# Altium PCB AtlysAFE.PcbDoc (part 1 of 2)
Units mm, origin at the board's own origin, x right, y up, seen from the top; angles counter-clockwise.
Board outline 100 x 101.6 mm, 6 copper layers (Top Layer, Internal Plane 1, Internal Plane 2, Internal Plane 3, Internal Plane 4, Bottom Layer), stack 1.611 mm thick; 311 components, 255 nets, 1157 pads, 209 vias.
Unrouted connection lines stored in the file: 701.
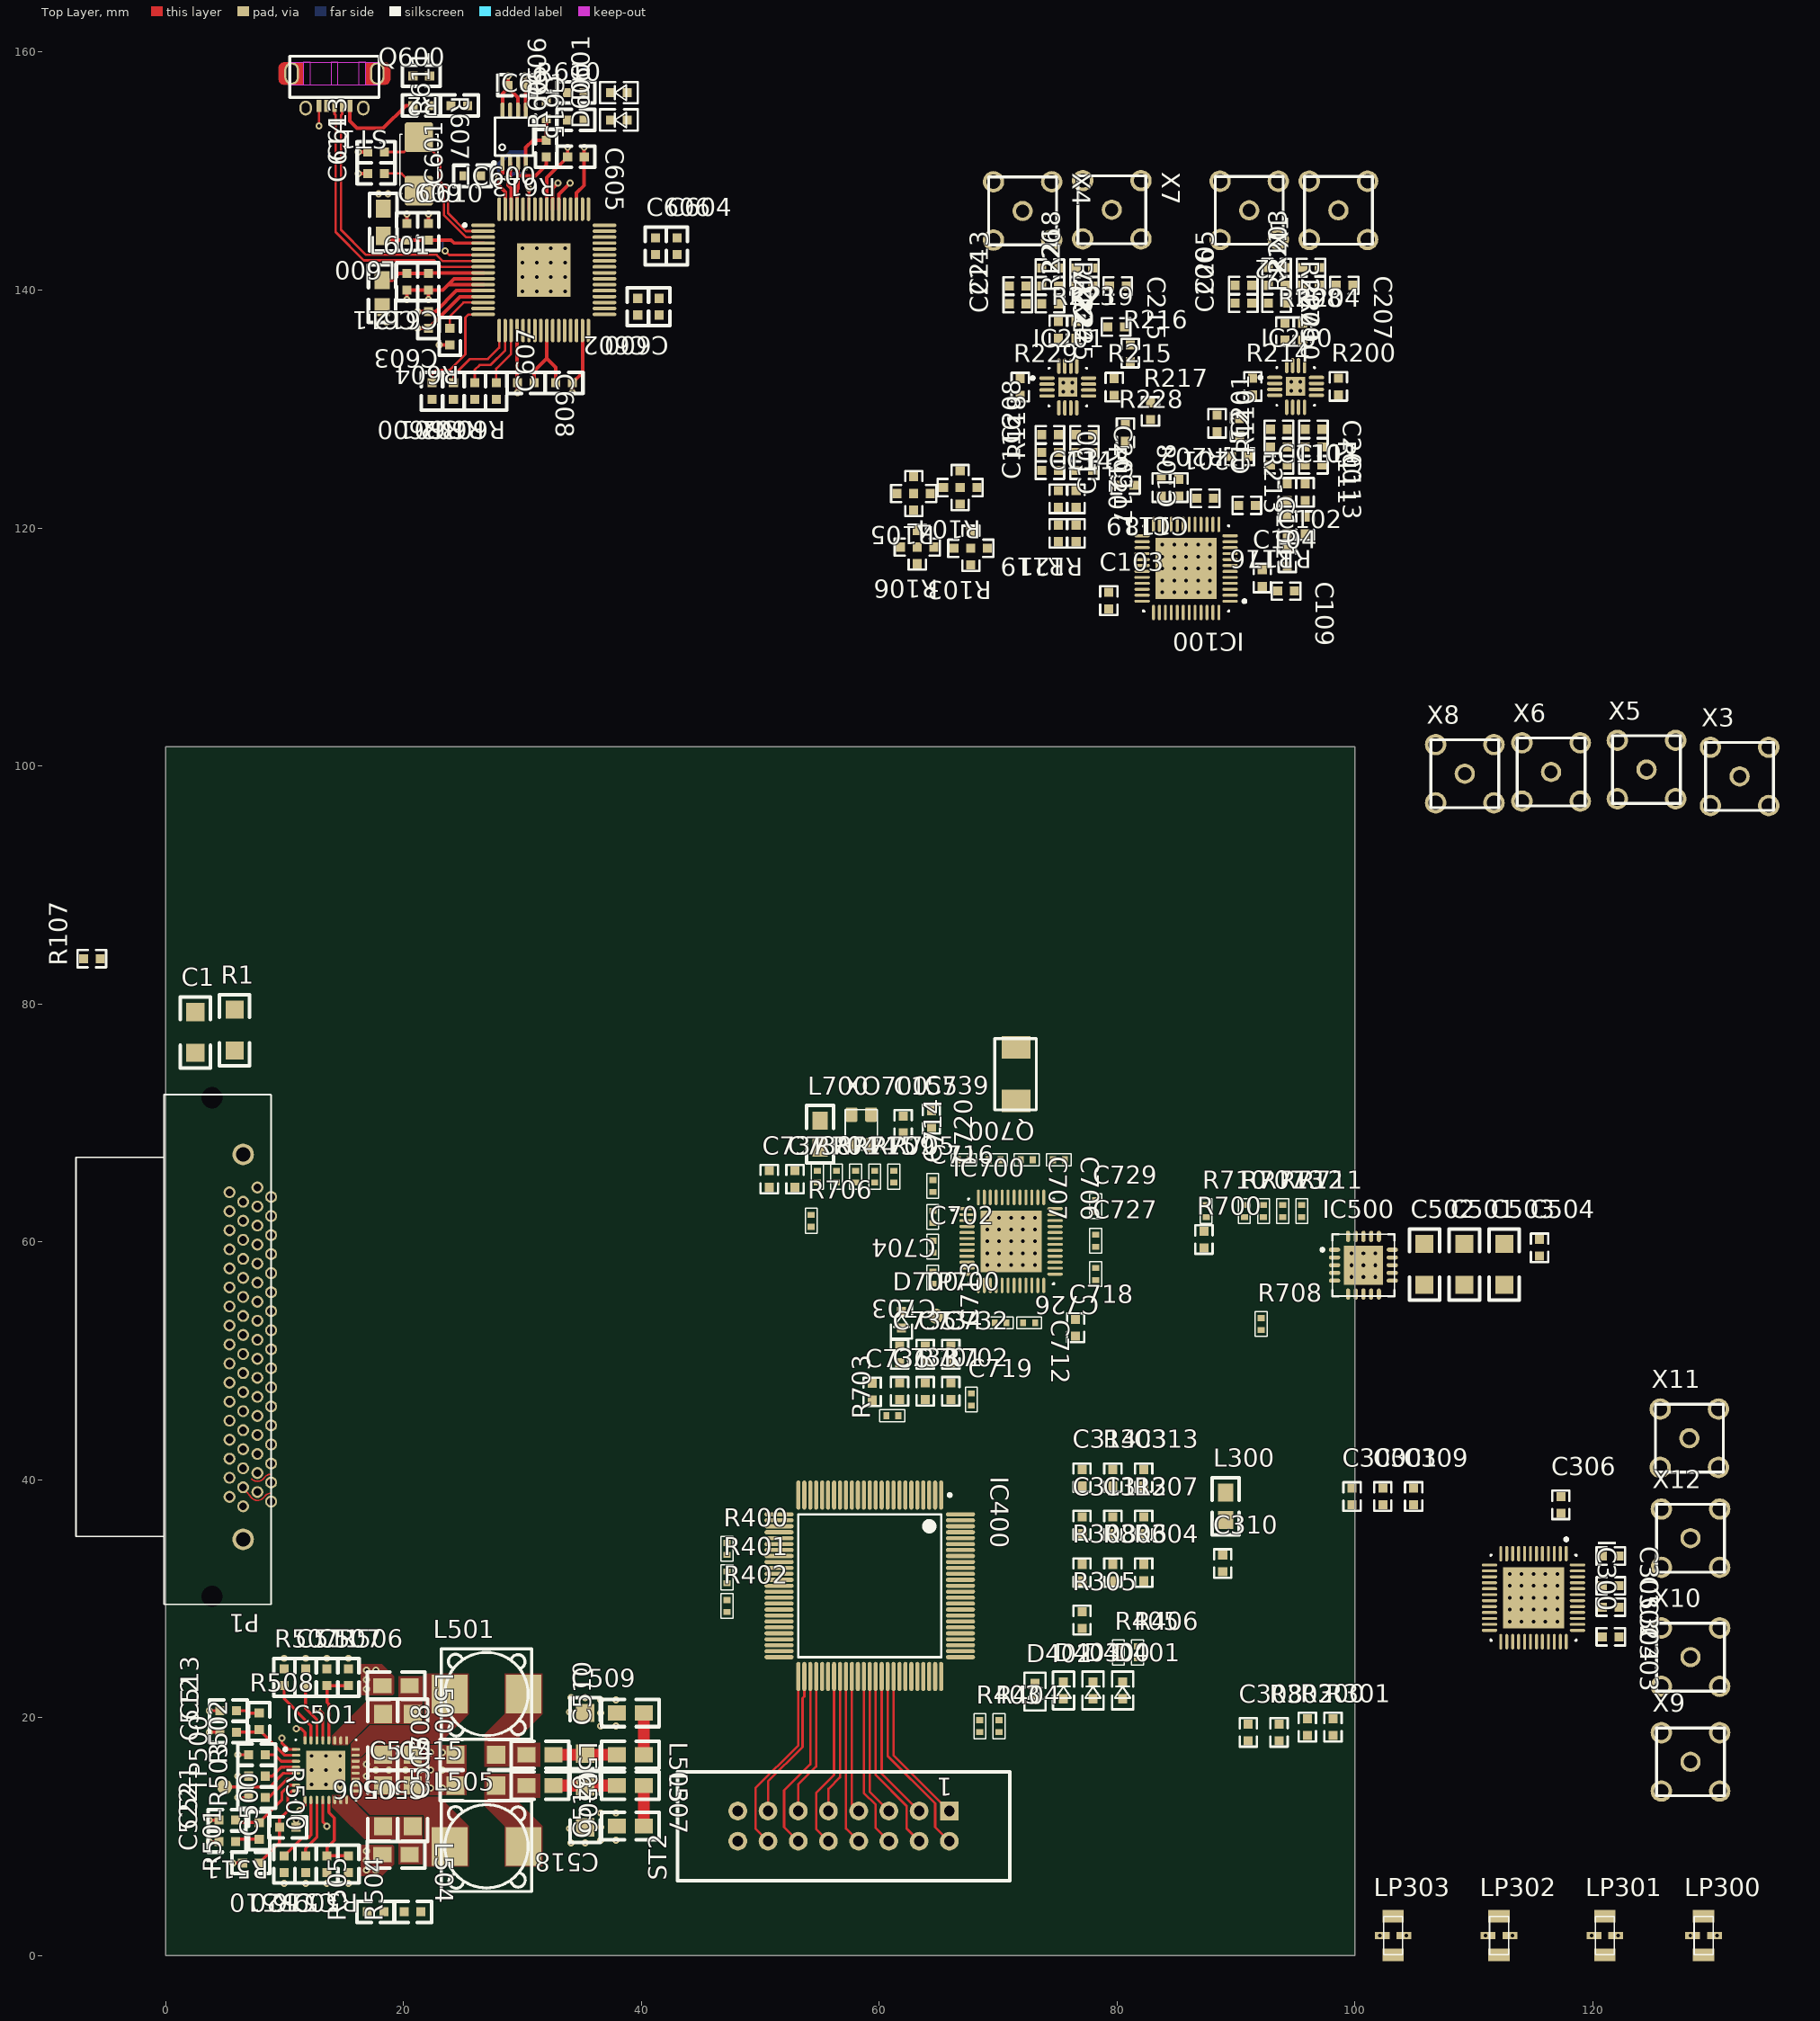
[diagram p0: Top Layer view]
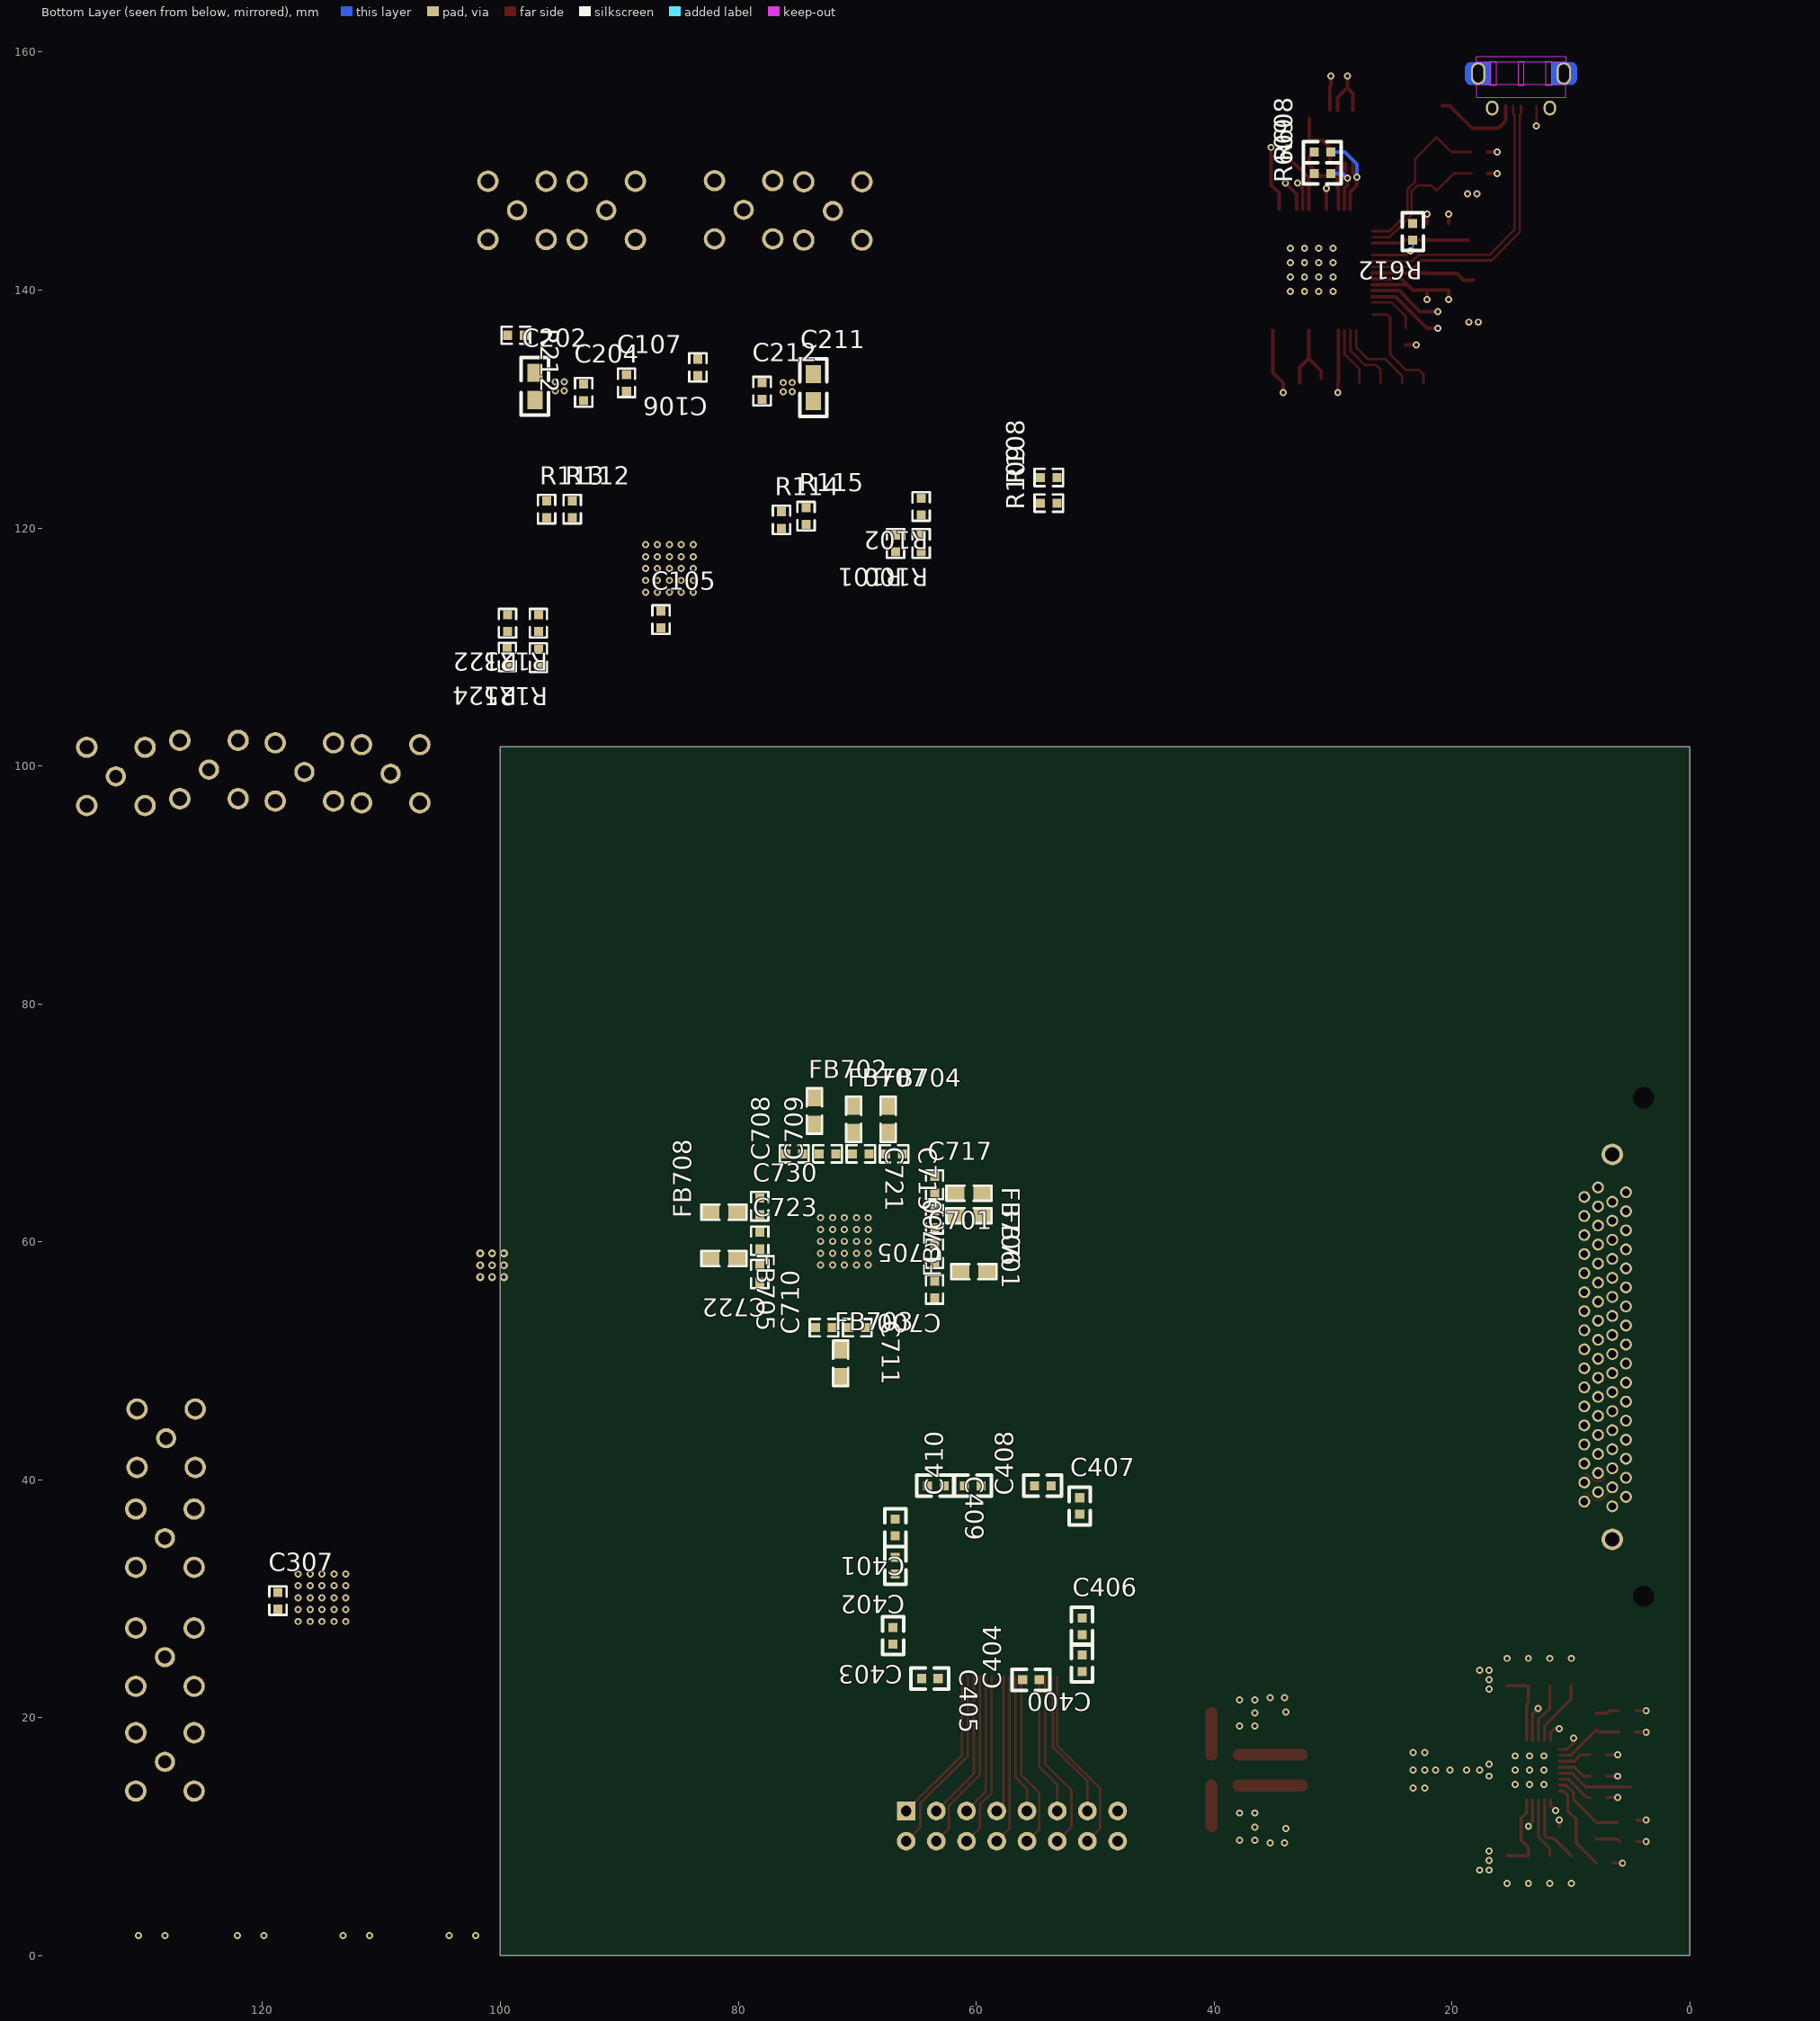
[diagram p1: Bottom Layer view, seen from below]
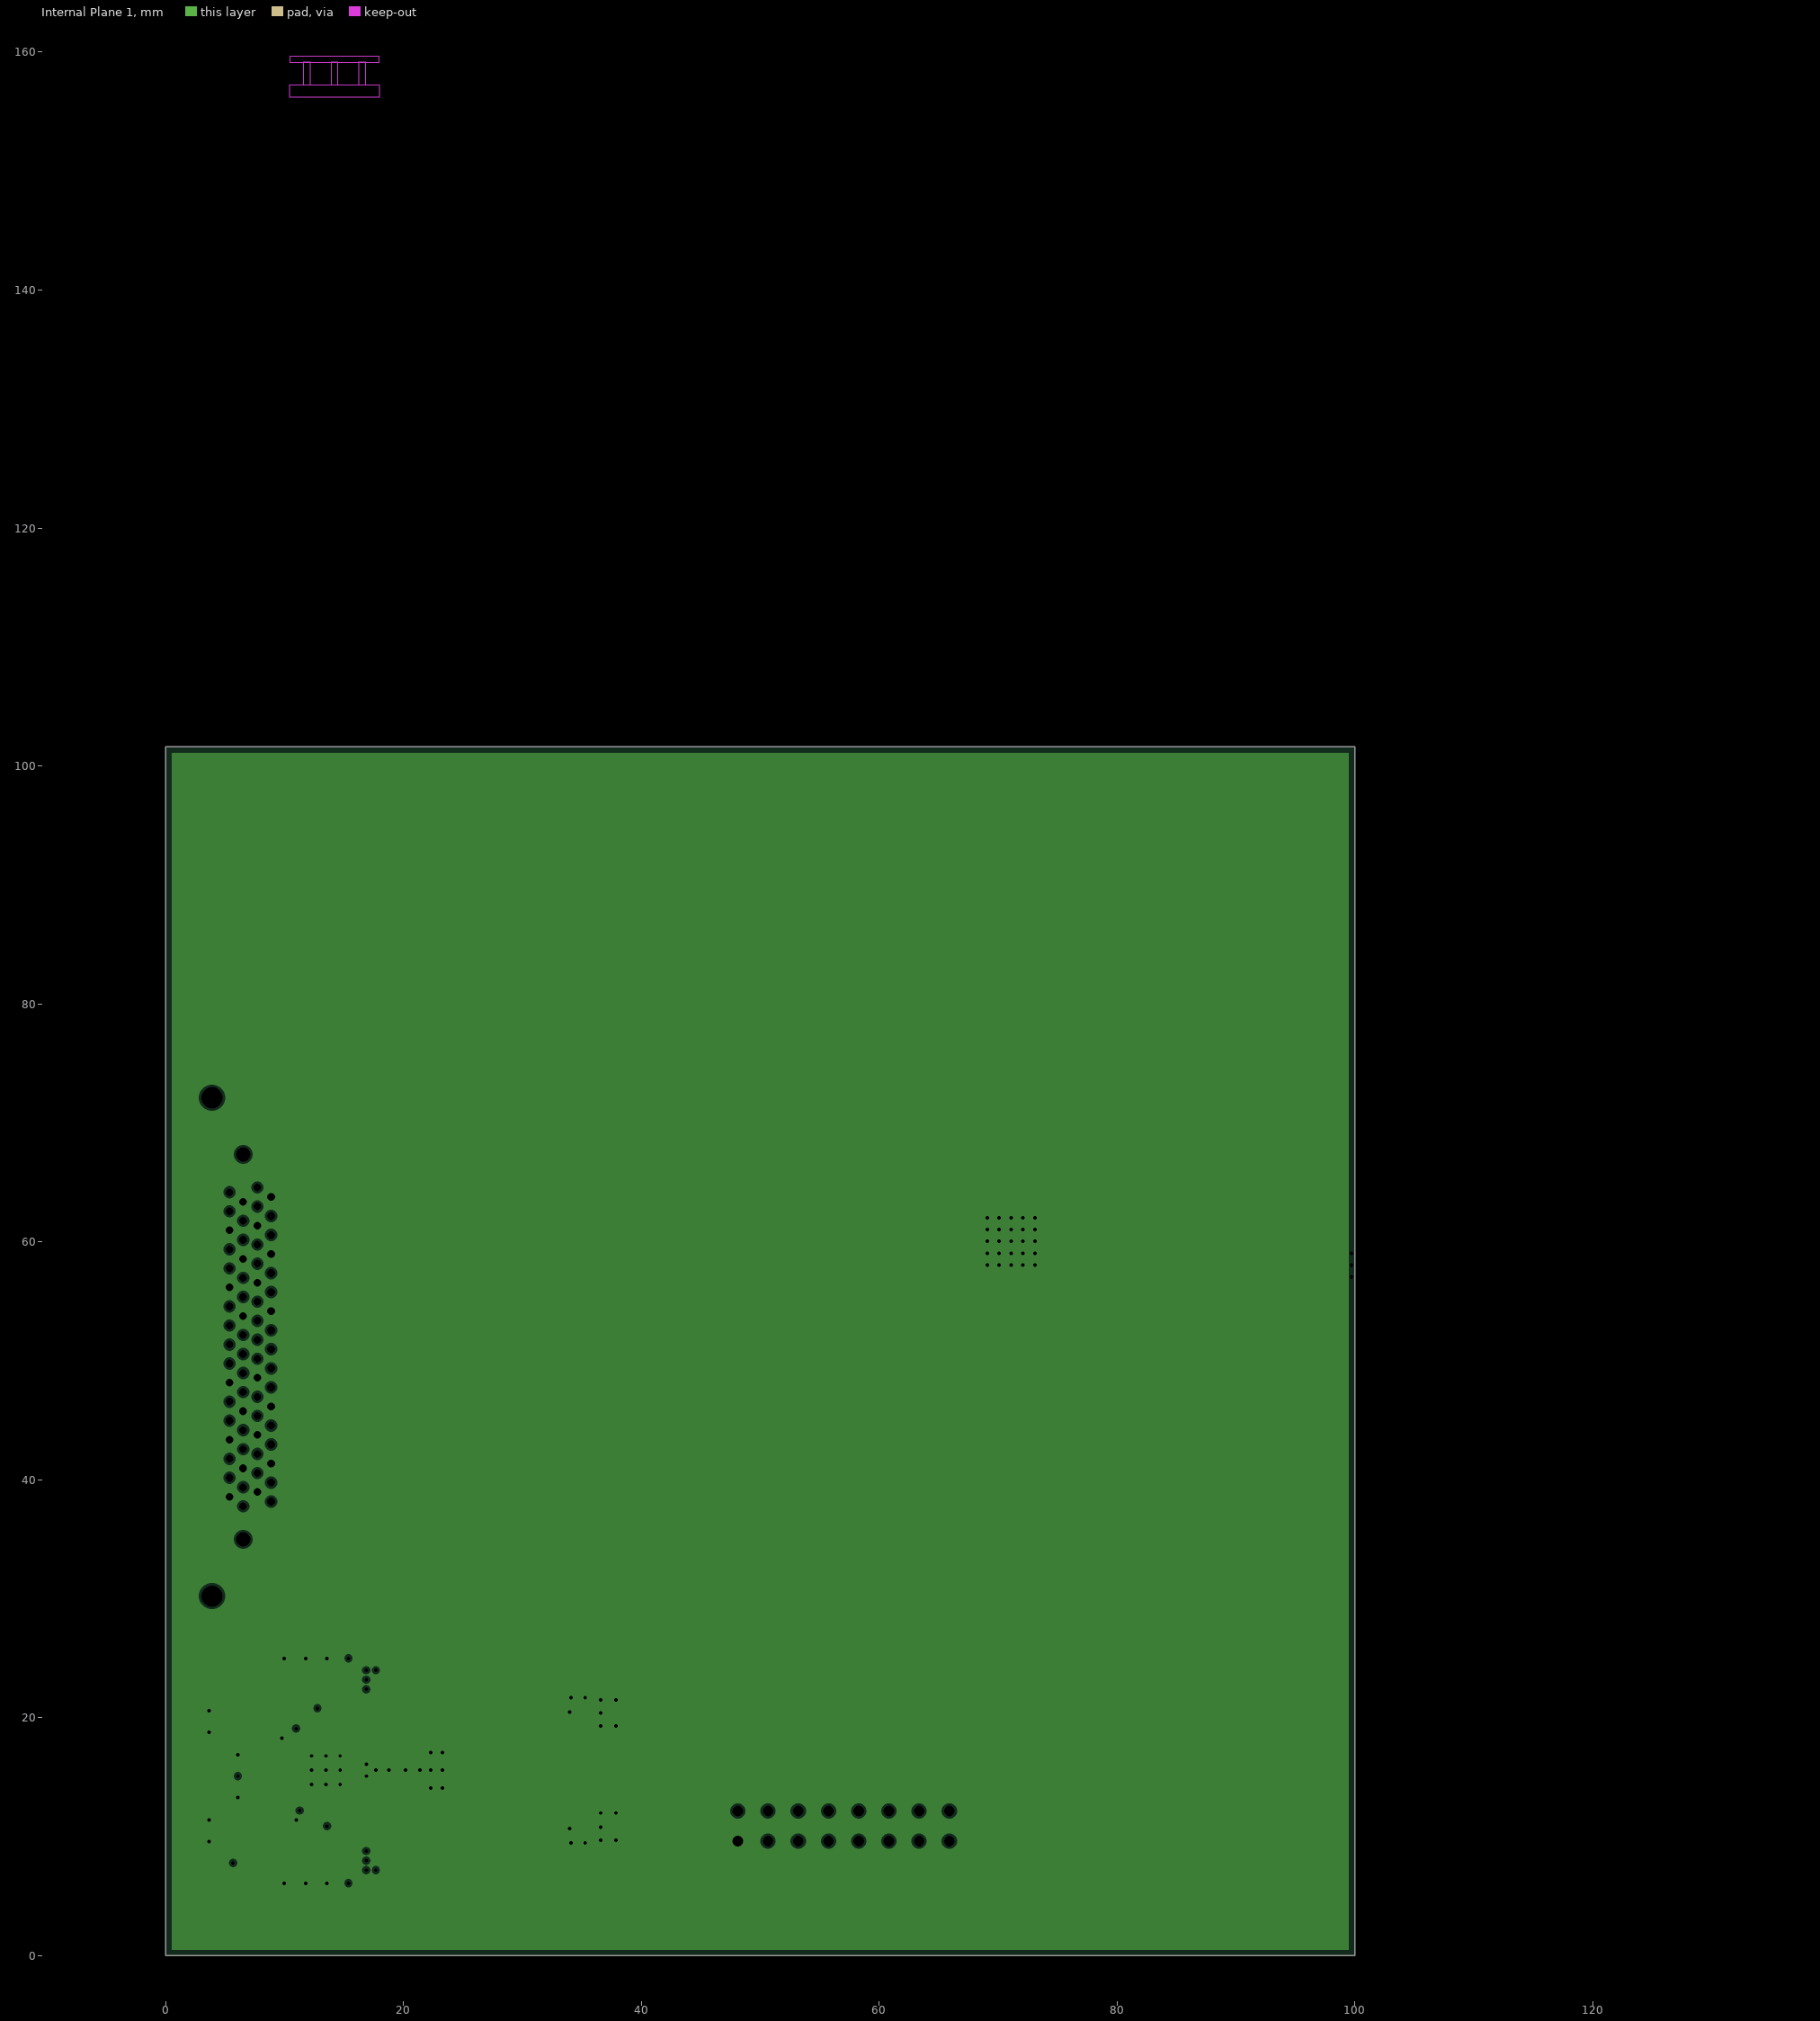
[diagram p2: Internal Plane 1, clearances drawn from the general rule]
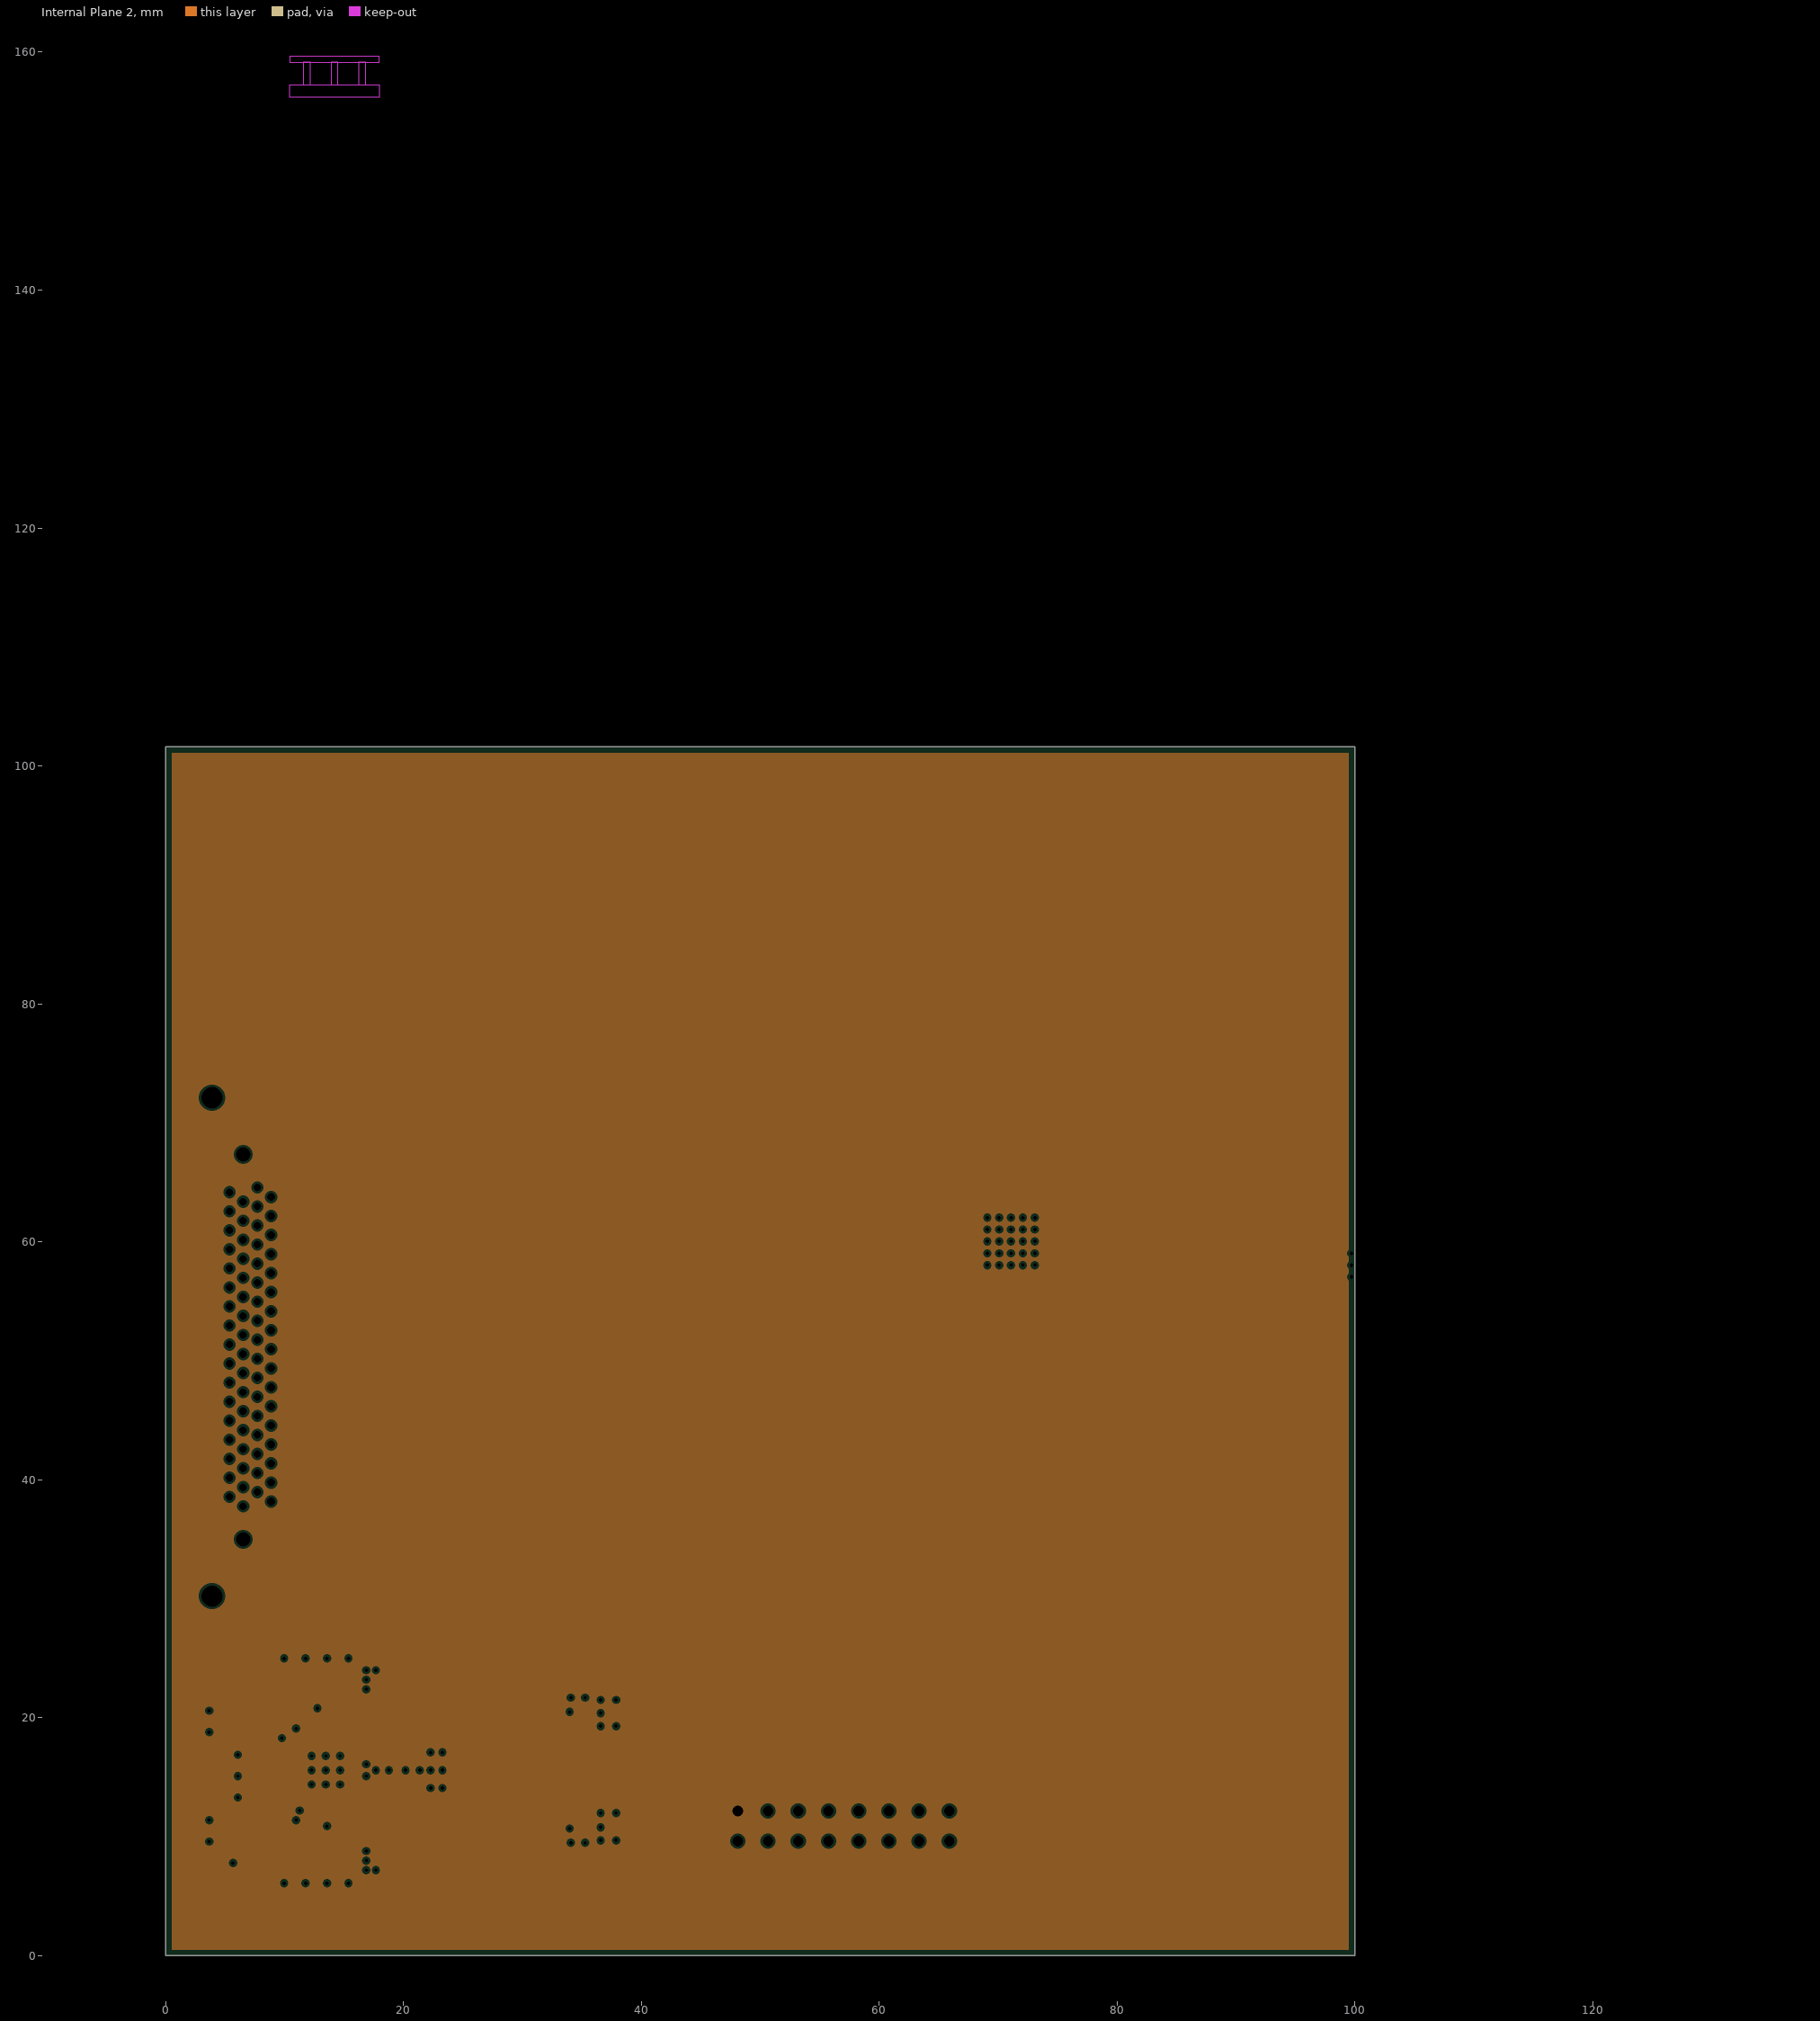
[diagram p3: Internal Plane 2, clearances drawn from the general rule]
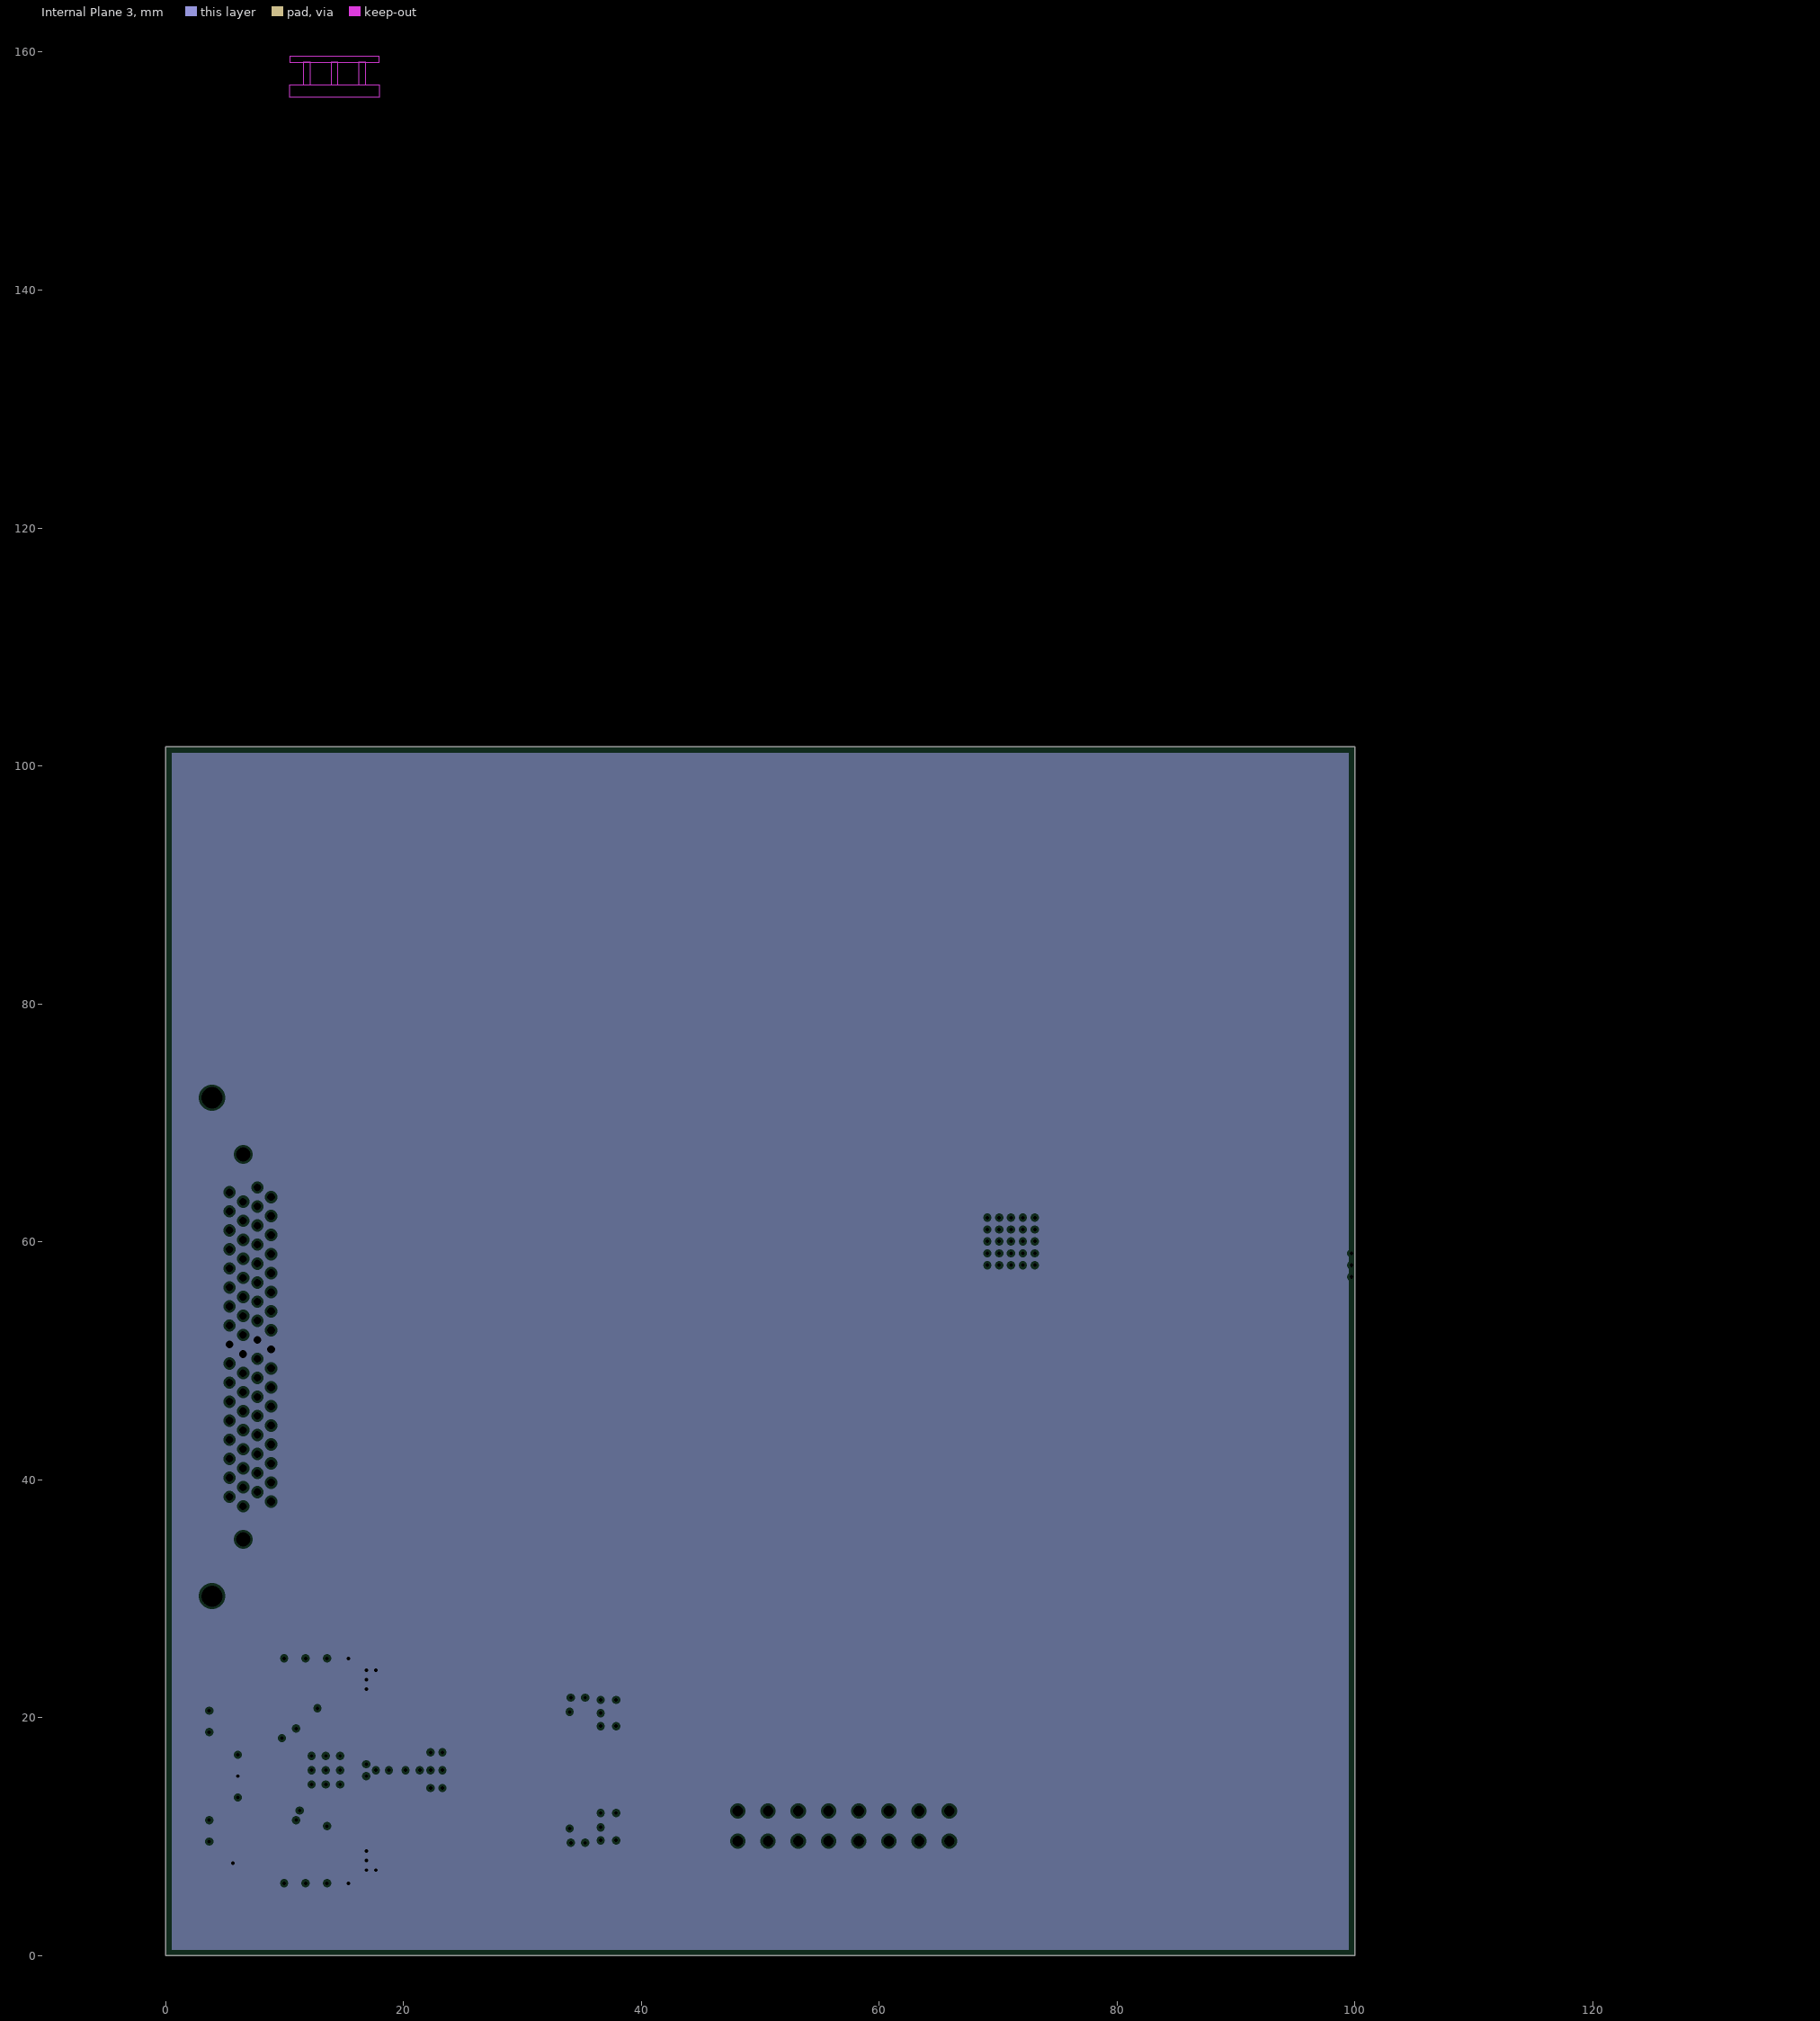
[diagram p4: Internal Plane 3, clearances drawn from the general rule]
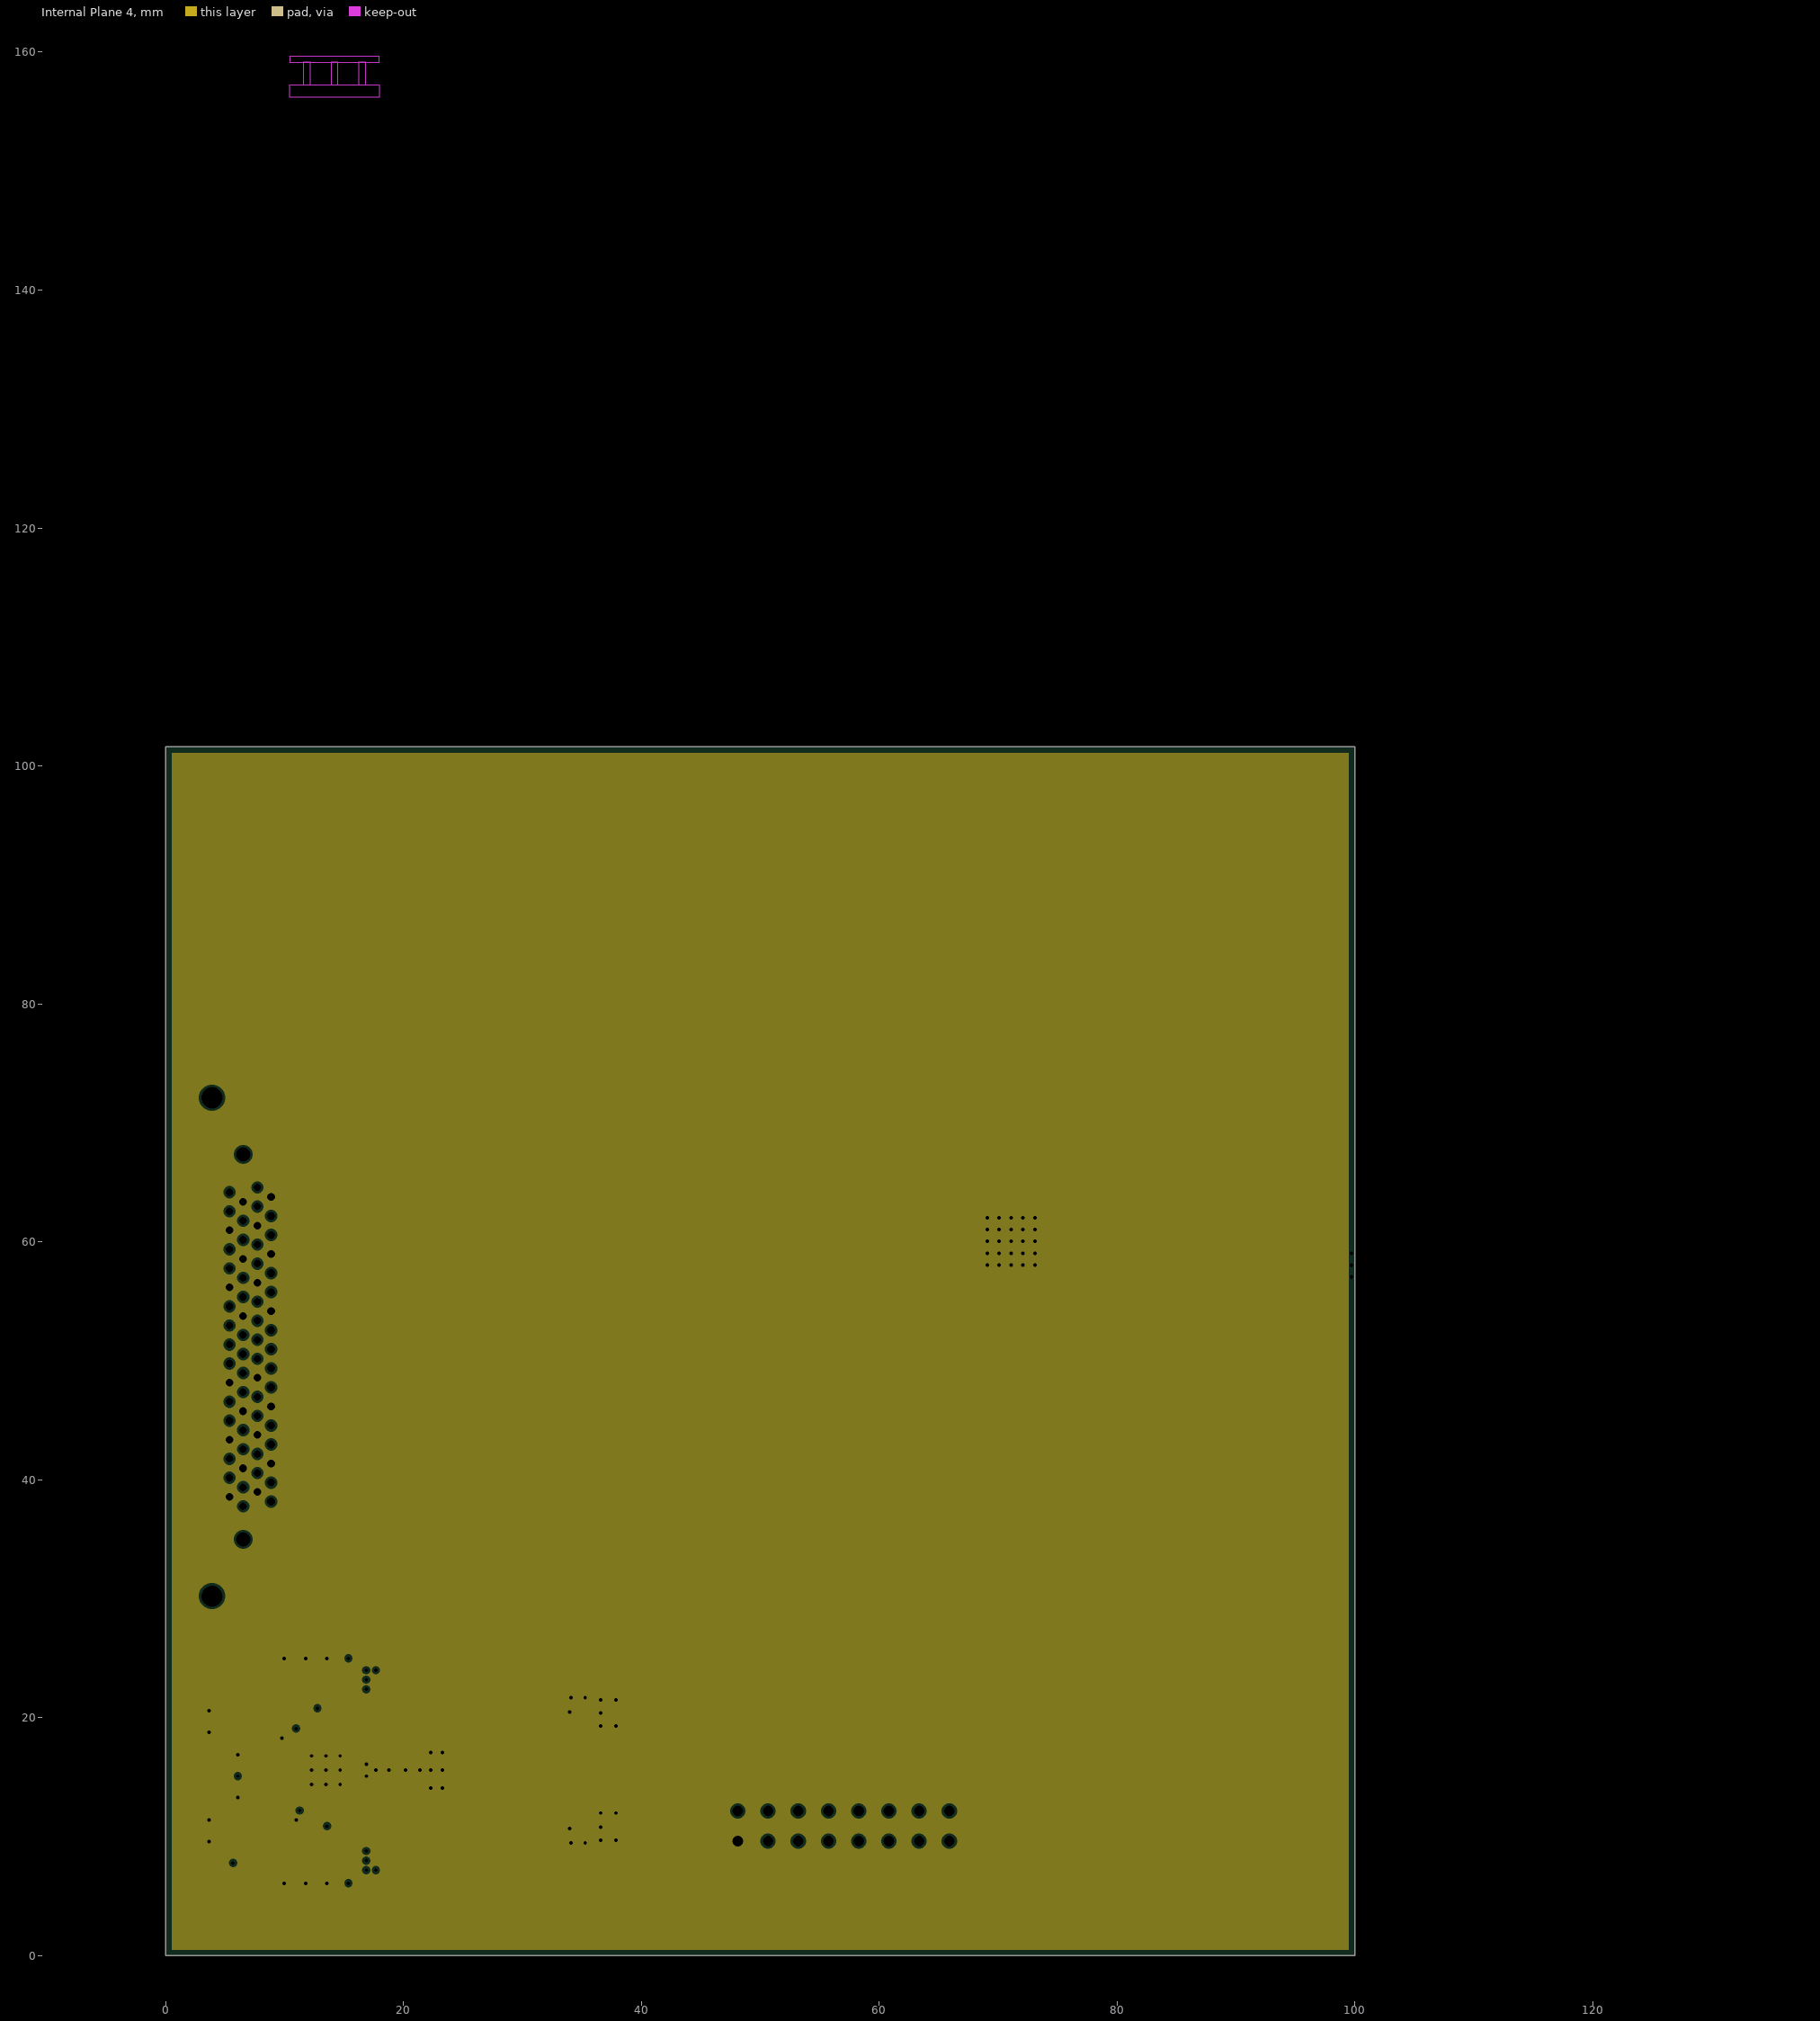
[diagram p5: Internal Plane 4, clearances drawn from the general rule]

## Layer stack, top to bottom
Top Layer: signal copper 0.0356
Dielectric: prepreg 0.126, FR-4, Dk 4.8
Internal Plane 1: plane copper 0.0356, net GND
Dielectric: core 0.51, FR-4, Dk 4.8
Internal Plane 2: plane copper 0.0356, net 3V3D
Dielectric: prepreg 0.126, FR-4, Dk 4.8
Internal Plane 3: plane copper 0.0356, net 5VD
Dielectric: core 0.51, FR-4, Dk 4.8
Internal Plane 4: plane copper 0.0356, net GND
Dielectric: prepreg 0.126, FR-4, Dk 4.8
Bottom Layer: signal copper 0.0356

## Board outline
0,0 100,0 100,101.6 0,101.6

## Design rules (kind name [scope] priority, off if disabled: settings)
Clearance [All] p1: gap=0.127
DiffPairsRouting [All] p1: maxlimit=0.254 minlimit=0.127 mostfreqgap=0.127 maxuncoupledlength=12.7
HoleSize [All] p1: absolutevalues=TRUE maxlimit=2 minlimit=0.3 maxpercent=80.000 minpercent=20.000
HoleToHoleClearance [All] p1: gap=0.4 allowstackedmicrovias=TRUE
MatchedLengths [All] p1: tolerance=25.4 checknetsindiffpair=TRUE checkdiffpairvsdiffpair=FALSE checkothers=FALSE
MinimumSolderMaskSliver [All] p1: minsoldermaskwidth=0.12
PlaneClearance [All] p1: clearance=0.2
PlaneConnect [All] p1: planeconnectstyle=Direct reliefexpansion=0.508 reliefentries=4 reliefconductorwidth=0.254 reliefairgap=0.254
PolygonConnect [All] p1: connectstyle=Direct reliefconductorwidth=0.254 reliefentries=4 polygonreliefangle="90 Angle" airgapwidth=0.254
RoutingVias [All] p1: holewidth=0.3 width=0.6 viastyle="Through Hole" minholewidth=0.3 minwidth=0.6 maxholewidth=0.3 maxwidth=0.6
SilkscreenOverComponentPads [All] p1: minsilkscreentomaskgap=0.254
SolderMaskExpansion [All] p1: expansion=0.075
Width [All] p1: maxlimit=1 minlimit=0.127 preferedwidth=0.2
21 further rules are at their usual default settings.

## Classes and differential pairs
net class Power: 1V8D 3V3A 3V3D NetC500_2 NetC505_1 NetC508_1 NetC509_1 NetC514_1 NetC517_1 NetC518_1 NetIC501_17 NetIC501_23
differential pair USB_D: +USB_D_P -USB_D_N
differential pair IO20: +IO20_P -IO20_N
differential pair IO19: +IO19_P -IO19_N
differential pair IO18: +IO18_P -IO18_N
differential pair IO17: +IO17_P -IO17_N
differential pair IO16: +IO16_P -IO16_N
differential pair IO15: +IO15_P -IO15_N
differential pair IO14: +IO14_P -IO14_N
differential pair IO13: +IO13_P -IO13_N
differential pair IO12: +IO12_P -IO12_N
differential pair IO11: +IO11_P -IO11_N
differential pair IO10: +IO10_P -IO10_N
differential pair IO9: +IO9_P -IO9_N
differential pair IO8: +IO8_P -IO8_N
differential pair IO7: +IO7_P -IO7_N
differential pair IO6: +IO6_P -IO6_N
differential pair IO5: +IO5_P -IO5_N
differential pair IO4: +IO4_P -IO4_N
differential pair IO3: +IO3_P -IO3_N
differential pair IO2: +IO2_P -IO2_N
differential pair IO1: +IO1_P -IO1_N
differential pair INB: +INB_P -INB_N
differential pair INA: +INA_P -INA_N
differential pair DACB_OUT: +DACB_OUT_P -DACB_OUT_N
differential pair DACA_OUT: +DACA_OUT_P -DACA_OUT_N
differential pair ADC_CLK: +ADC_CLK_P -ADC_CLK_N

## Components (designator, comment, footprint, x,y, rotation, side; value= is the part's Value field where it differs from the comment)
C1 "1nF / 200V" 1206 2.5,77.6 r90 top
C100 "1uF" "0603 SMALL OUTLINE" 80.7,123.6 r180 top
C101 "100nF" "0603 SMALL OUTLINE" 90.9,121.9 r0 top
C102 "100nF" "0603 SMALL OUTLINE" 94.3,117.5 r90 top
C103 "100nF" "0603 SMALL OUTLINE" 79.3,113.9 r90 top
C104 "100nF" "0603 SMALL OUTLINE" 92.2,115.8 r90 top
C105 "1uF" "0603 SMALL OUTLINE" 86.5,112.3 r90 bottom
C106 "100nF" "0603 SMALL OUTLINE" 83.4,133.5 r270 bottom
C107 "100nF" "0603 SMALL OUTLINE" 89.4,132.2 r90 bottom
C108 "100nF" "0603 SMALL OUTLINE" 87.4,122.5 r180 top
C109 "2nF" "0603 SMALL OUTLINE" 94.2,114.7 r0 top
C110 "100n" "0603 SMALL OUTLINE" 94.3,123 r90 top
C111 "100n" "0603 SMALL OUTLINE" 95.8,123 r90 top
C112 "TBD" "0603 SMALL OUTLINE" 93.6,125.3 r180 top
C113 "TBD" "0603 SMALL OUTLINE" 96.5,125.3 r0 top
C114 "100n" "0603 SMALL OUTLINE" 75.05,122.45 r90 top
C115 "100n" "0603 SMALL OUTLINE" 76.55,122.45 r90 top
C116 "TBD" "0603 SMALL OUTLINE" 74.35,124.85 r180 top
C117 "TBD" "0603 SMALL OUTLINE" 77.25,124.85 r0 top
C118 "C" "0603 SMALL OUTLINE" 85.2,123.4 r270 top
C119 "C" "0603 SMALL OUTLINE" 83.7,123.4 r270 top
C155 "100n" "0603 SMALL OUTLINE" 62.009,69.877 r90 top
C200 "100n" "0603 SMALL OUTLINE" 96.5,128.3 r0 top
C201 "100n" "0603 SMALL OUTLINE" 93.6,128.3 r180 top
C202 "10u" 0805 97.1,131.9 r90 bottom
C204 "100n" "0603 SMALL OUTLINE" 93,131.4 r90 bottom
C205 "TBD" "0603 SMALL OUTLINE" 90.6,140.4 r180 top
C206 "TBD" "0603 SMALL OUTLINE" 90.6,138.9 r180 top
C207 "TBD" "0603 SMALL OUTLINE" 99.1,140.4 r0 top
C208 "100n" "0603 SMALL OUTLINE" 74.35,127.85 r180 top
C209 "100n" "0603 SMALL OUTLINE" 77.25,127.85 r0 top
C211 "10u" 0805 73.7,131.8 r90 bottom
C212 "100n" "0603 SMALL OUTLINE" 78,131.5 r90 bottom
C213 "TBD" "0603 SMALL OUTLINE" 71.65,140.35 r180 top
C214 "TBD" "0603 SMALL OUTLINE" 71.65,138.85 r180 top
C215 "TBD" "0603 SMALL OUTLINE" 80.05,140.35 r0 top
C300 "100nF" "0603 SMALL OUTLINE" 99.742,38.602 r90 top
C301 "100nF" "0603 SMALL OUTLINE" 102.332,38.602 r90 top
C302 "100nF" "0603 SMALL OUTLINE" 121.5,31.1 r0 top
C303 "100nF" "0603 SMALL OUTLINE" 121.5,26.8 r0 top
C304 "100nF" "0603 SMALL OUTLINE" 121.5,29.3 r0 top
C305 "100nF" "0603 SMALL OUTLINE" 121.5,33.6 r0 top
C306 "100nF" "0603 SMALL OUTLINE" 117.3,37.9 r90 top
C307 "100nF" "0603 SMALL OUTLINE" 118.7,29.85 r90 bottom
C308 "100nF" "0603 SMALL OUTLINE" 91.02,18.777 r90 top
C309 "100nF" "0603 SMALL OUTLINE" 104.923,38.602 r90 top
C310 "100nF" "0603 SMALL OUTLINE" 88.87,32.963 r90 top
C311 "100nF" "0603 SMALL OUTLINE" 77.045,36.189 r90 top
C312 "100nF" "0603 SMALL OUTLINE" 79.636,36.189 r90 top
C313 "100nF" "0603 SMALL OUTLINE" 82.227,40.177 r90 top
C314 "100nF" "0603 SMALL OUTLINE" 77.045,40.177 r90 top
C400 "100nF" 0603 51.1,24.6 r270 bottom
C401 "100nF" 0603 66.8,36 r270 bottom
C402 "100nF" 0603 66.8,32.8 r270 bottom
C403 "100nF" 0603 67,26.9 r270 bottom
C404 "100nF" 0603 55.4,23.2 r0 bottom
C405 "100nF" 0603 63.9,23.3 r180 bottom
C406 "100nF" 0603 51.1,27.7 r90 bottom
C407 "100nF" 0603 51.3,37.8 r90 bottom
C408 "100nF" 0603 54.4,39.5 r0 bottom
C409 "100nF" 0603 63.4,39.5 r180 bottom
C410 "100nF" 0603 60.3,39.5 r0 bottom
C500 "1u" 0603 10.275,10.8 r180 top
C501 "47u" 1206 109.187,58.105 r90 top
C502 "47u" 1206 105.834,58.105 r90 top
C503 "22u" 1206 112.54,58.105 r90 top
C504 "1u" "0603 SMALL OUTLINE" 115.512,59.502 r90 top
C505 "22u" 1206 20.775,18.6 r270 top
C506 "22u" 1206 18.275,18.6 r270 top
C507 "100n" 0603 13.575,23.4 r90 top
C508 "47u" 1206 26.075,16.9 r180 top
C509 "47u" 1206 35.275,18.7 r90 top
C510 "1u" 0805 39.075,20.4 r180 top
C511 "10n" 0603 11.775,23.4 r90 top
C512 "NU" 0603 5.275,18.8 r180 top
C513 "1n2" 0603 5.275,20.6 r180 top
C514 "22u" 1206 18.275,12.6 r90 top
C515 "22u" 1206 20.775,12.6 r90 top
C516 "100n" 0603 13.575,7.7 r270 top
C517 "47u" 1206 26.075,14.3 r180 top
C518 "47u" 1206 35.275,12.5 r270 top
C519 "1u" 0805 39.075,10.9 r180 top
C520 "10n" 0603 11.775,7.7 r270 top
C521 "100p" 0603 5.175,11.4 r180 top
C522 "2n7" 0603 5.175,9.6 r180 top
C600 "1uF" 0603 41.5,138.601 r270 top
C601 "100nF" 0603 25.8,149.6 r180 top
C602 "100nF" 0603 39.7,138.601 r270 top
C603 "100nF" 0603 22.1,137.5 r270 top
C604 "1uF" 0603 43,143.7 r90 top
C605 "100nF" 0603 34.5,151.2 r0 top
C606 "100nF" 0603 41.2,143.7 r90 top
C607 "100nF" 0603 33.5,132.2 r180 top
C608 "100nF" 0603 30.3,132.2 r0 top
C609 "4u7F" 0603 20.3,144.9 r90 top
C610 "100nF" 0603 22.1,144.9 r90 top
C611 "4u7F" 0603 20.3,140.7 r270 top
C612 "100nF" 0603 22.1,140.7 r270 top
C613 "18pF" 0603 17.7,151.6 r180 top
C614 "18pF" 0603 17.7,149.8 r180 top
C615 "100nF" 0603 29.5,157.2 r0 top
C700 "1µ" "0603 SMALL OUTLINE" 63.5,56 r270 bottom
C701 "1µ" "0603 SMALL OUTLINE" 63.5,59 r90 bottom
C702 "10n" 0402 64.5,59.6 r90 top
C703 "10n" 0402 64.5,57 r270 top
C704 "10n" 0402 64.5,62.1 r270 top
C705 "1µ" "0603 SMALL OUTLINE" 63.5,61.9 r270 bottom
C706 "10n" 0402 75.1,66.9 r0 top
C707 "10n" 0402 72.4,66.9 r0 top
C708 "1µ" "0603 SMALL OUTLINE" 75.3,67.4 r0 bottom
C709 "1µ" "0603 SMALL OUTLINE" 72.5,67.4 r0 bottom
C710 "1µ" "0603 SMALL OUTLINE" 72.8,52.8 r0 bottom
C711 "1µ" "0603 SMALL OUTLINE" 70,52.8 r180 bottom
C712 "10n" 0402 72.6,53.2 r0 top
C713 "10n" 0402 70.2,53.2 r180 top
C714 "10n" 0402 67.1,66.9 r180 top
C715 "1µ" "0603 SMALL OUTLINE" 66.9,67.4 r180 bottom
C716 "10n" 0402 64.5,64.7 r90 top
C717 "1µ" "0603 SMALL OUTLINE" 63.5,64.8 r90 bottom
C718 "1µ" "0603 SMALL OUTLINE" 76.509,52.784 r90 top
C719 "10n" 0402 67.742,46.754 r90 top
C720 "10n" 0402 69.7,66.9 r180 top
C721 "1µ" "0603 SMALL OUTLINE" 69.7,67.4 r180 bottom
C722 "1µ" "0603 SMALL OUTLINE" 78.2,57.3 r270 bottom
C723 "1µ" "0603 SMALL OUTLINE" 78.2,60.1 r90 bottom
C726 "10n" 0402 78.2,57.3 r270 top
C727 "10n" 0402 78.2,60.1 r90 top
C729 "10n" 0402 78.2,63 r90 top
C730 "1µ" "0603 SMALL OUTLINE" 78.2,63 r90 bottom
C732 "1µ" "0603 SMALL OUTLINE" 66.02,50.557 r90 top
C733 "10µ" "0603 SMALL OUTLINE" 61.704,47.449 r90 top
C734 "10µ" "0603 SMALL OUTLINE" 63.862,50.557 r90 top
C735 "1µ" "0603 SMALL OUTLINE" 61.704,50.557 r90 top
C736 "270n" "0603 SMALL OUTLINE" 59.4,47.4 r90 top
C737 "10n" "0603 SMALL OUTLINE" 50.754,65.278 r90 top
C738 "1n" "0603 SMALL OUTLINE" 52.912,65.278 r90 top
C739 "1n" "0603 SMALL OUTLINE" 64.384,70.317 r90 top
D400 "GRN" "LED SMD 0603" 77.975,22.298 r90 top
D401 "GRN" "LED SMD 0603" 80.464,22.298 r90 top
D402 "GRN" "LED SMD 0603" 73.1,22.2 r90 top
D403 "RED" "LED SMD 0603" 75.486,22.298 r90 top
D600 "RX LED" "LED SMD 0603" 38.1,154.3 r180 top
D601 "TX LED" "LED SMD 0603" 38.1,156.6 r180 top
D700 "GRN" "LED SMD 0603" 61.87,53.47 r90 top
FB700 "120R" "0805 SMALL OUTLINE" 60.2,57.5 r0 bottom
FB701 "1k" "0805 SMALL OUTLINE" 60.6,62.2 r180 bottom
FB702 "1k" "0805 SMALL OUTLINE" 73.6,71 r90 bottom
FB703 "120R" "0805 SMALL OUTLINE" 71.4,49.8 r90 bottom
FB704 "120R" "0805 SMALL OUTLINE" 67.4,70.3 r90 bottom
FB705 "120R" "0805 SMALL OUTLINE" 81.2,58.6 r180 bottom
FB706 "120R" "0805 SMALL OUTLINE" 60.6,64.1 r180 bottom
FB707 "120R" "0805 SMALL OUTLINE" 70.3,70.3 r90 bottom
FB708 "1k" "0805 SMALL OUTLINE" 81.2,62.5 r0 bottom
IC100 "ADS6245" 48VQFN 85.8,116.6 r180 top
IC200 "THS4509" QFN16_LONG 95,131.9 r0 top
IC201 "THS4509" QFN16_LONG 75.85,131.85 r0 top
IC300 "DAC3283" 48VQFN 115,30.1 r270 top
IC400 "LCMXO2-2000HC-4TG100C" TQFP100 59.2,31.1 r270 top
IC500 "TPS7A4700" VQFN20 100.704,58.042 r0 top
IC501 "ADP2114" LFCSP32_VQ 13.475,15.6 r0 top
IC600 "FT2232HL" 64QFN 31.8,141.7 r0 top
IC601 "93LC56C" MSOP8 29.3,152.9 r90 top
IC700 "CDCE62005" 48VQFN 71.079,60.042 r0 top
L300 "600R@100Mhz" 0805 89.124,37.777 r90 top
L500 "120R@100Mhz" 0805 19.375,22.7 r0 top
L501 "4u7" DR74 23.875,22 r0 top
L502 "120R@100Mhz" 0805 31.475,16.9 r0 top
L503 "120R@100Mhz" 0805 39.075,16.9 r0 top
L504 "120R@100Mhz" 0805 19.375,8.5 r0 top
L505 "4u7" DR74 23.875,9.2 r0 top
L506 "120R@100Mhz" 0805 31.475,14.3 r0 top
L507 "120R@100Mhz" 0805 39.075,14.3 r0 top
L600 "600R@100Mhz" 0805 18.3,145.7 r270 top
L601 "600R@100Mhz" 0805 18.2,139.7 r90 top
L700 "Ferrite" 0805 55.024,69.052 r90 top
LP300 "LFCN-225+" FV1206 129.3,1.7 r90 top
LP301 "LFCN-225+" FV1206 121,1.7 r90 top
LP302 "LFCN-225+" FV1206 112.1,1.7 r90 top
LP303 "LFCN-225+" FV1206 103.2,1.7 r90 top
P1 "VHDCI-68" VHDCI-68_M 6.525,35 r270 top
Q600 "12MHz" SMD_XTAL_5x3.2 21.3,150.6 r90 top
Q700 "TBD" XTAL_SMD_60_35 71.5,74.1 r270 top
R1 "1M" 1206 5.8,77.8 r90 top
R2 "0R" 0603 21.5,158 r180 top
R100 "33k" "0603 SMALL OUTLINE" 64.625,118.7 r270 bottom
R101 "22k" "0603 SMALL OUTLINE" 66.783,118.7 r270 bottom
R102 "33k" "0603 SMALL OUTLINE" 64.625,121.808 r270 bottom
R103 "0603_MUX4" 0603_MUX4 67.7,118.3 r180 top
R104 "0603_MUX4" 0603_MUX4 66.8,123.4 r180 top
R105 "0603_MUX4" 0603_MUX4 62.9,122.9 r180 top
R106 "0603_MUX4" 0603_MUX4 63.2,118.4 r180 top
R107 "0R" "0603 SMALL OUTLINE" -6.2,83.8 r180 top
R108 "47k" "0603 SMALL OUTLINE" 53.891,124.251 r0 bottom
R109 "47k" "0603 SMALL OUTLINE" 53.891,122.093 r0 bottom
R110 "TBD" "0603 SMALL OUTLINE" 93.6,126.8 r180 top
R111 "TBD" "0603 SMALL OUTLINE" 96.5,126.8 r0 top
R112 "50R" "0603 SMALL OUTLINE" 93.955,121.583 r90 bottom
R113 "50R" "0603 SMALL OUTLINE" 96.113,121.583 r90 bottom
R114 "50R" "0603 SMALL OUTLINE" 76.371,120.683 r90 bottom
R115 "50R" "0603 SMALL OUTLINE" 74.3,121 r90 bottom
R116 "5R" "0603 SMALL OUTLINE" 94.3,120.2 r270 top
R117 "5R" "0603 SMALL OUTLINE" 95.8,120.2 r270 top
R118 "TBD" "0603 SMALL OUTLINE" 74.35,126.35 r180 top
R119 "5R" "0603 SMALL OUTLINE" 75.05,119.55 r270 top
R120 "TBD" "0603 SMALL OUTLINE" 77.25,126.35 r0 top
R121 "5R" "0603 SMALL OUTLINE" 76.55,119.55 r270 top
R122 "R" "0603 SMALL OUTLINE" 99.4,112 r270 bottom
R123 "R" "0603 SMALL OUTLINE" 96.8,112 r270 bottom
R124 "R" "0603 SMALL OUTLINE" 99.418,109.161 r270 bottom
R125 "R" "0603 SMALL OUTLINE" 96.8,109.1 r270 bottom
R200 "348R" "0603 SMALL OUTLINE" 98.6,131.9 r90 top
R201 "0R" "0603 SMALL OUTLINE" 90.3,128.5 r270 top
R202 "(500)" "0603 SMALL OUTLINE" 88.4,128.8 r270 top
R203 "0R" "0603 SMALL OUTLINE" 96.3,141.9 r180 top
R204 "169R" "0603 SMALL OUTLINE" 95.6,136.5 r90 top
R207 "(0R)" "0603 SMALL OUTLINE" 93.4,141.9 r0 top
R208 "169R" "0603 SMALL OUTLINE" 94.1,136.5 r90 top
R209 "TBD" "0603 SMALL OUTLINE" 93.4,140.4 r0 top
R210 "49R9" "0603 SMALL OUTLINE" 93.4,138.9 r0 top
R211 "49R9" "0603 SMALL OUTLINE" 96.3,140.4 r180 top
R212 "47k" "0603 SMALL OUTLINE" 98.7,136.2 r180 bottom
R213 "(500)" "0603 SMALL OUTLINE" 90.3,126 r0 top
R214 "348R" "0603 SMALL OUTLINE" 91.4,131.9 r90 top
R215 "348R" "0603 SMALL OUTLINE" 79.75,131.85 r90 top
R216 "0R" "0603 SMALL OUTLINE" 81.1,134.7 r90 top
R217 "(500)" "0603 SMALL OUTLINE" 82.8,129.8 r90 top
R218 "0R" "0603 SMALL OUTLINE" 77.25,141.85 r180 top
R219 "169R" "0603 SMALL OUTLINE" 76.55,136.65 r90 top
R222 "(0R)" "0603 SMALL OUTLINE" 74.35,141.85 r0 top
R223 "169R" "0603 SMALL OUTLINE" 75.05,136.65 r90 top
R224 "TBD" "0603 SMALL OUTLINE" 74.35,140.35 r0 top
R225 "49R9" "0603 SMALL OUTLINE" 74.35,138.85 r0 top
R226 "49R9" "0603 SMALL OUTLINE" 77.25,140.35 r180 top
R227 "47k" "0603 SMALL OUTLINE" 79.9,136.9 r180 top
R228 "(500)" "0603 SMALL OUTLINE" 80.7,128 r90 top
R229 "348R" "0603 SMALL OUTLINE" 71.85,131.85 r90 top
R300 "0R" "0603 SMALL OUTLINE" 95.986,19.217 r90 top
R301 "0R" "0603 SMALL OUTLINE" 98.144,19.217 r90 top
R302 "960R" "0603 SMALL OUTLINE" 93.611,18.777 r90 top
R303 "100R" "0603 SMALL OUTLINE" 79.636,40.177 r90 top
R304 "150R" "0603 SMALL OUTLINE" 82.227,32.202 r90 top
R305 "150R" "0603 SMALL OUTLINE" 77.045,28.214 r90 top
R306 "100R" "0603 SMALL OUTLINE" 79.636,32.202 r90 top
R307 "150R" "0603 SMALL OUTLINE" 82.227,36.189 r90 top
R308 "150R" "0603 SMALL OUTLINE" 77.045,32.202 r90 top
R400 "100R" 0402 47.2,34.2 r90 top
R401 "100R" 0402 47.2,31.8 r90 top
R402 "100R" 0402 47.2,29.4 r90 top
R403 "470R" 0402 68.456,19.301 r90 top
R404 "470R" 0402 70.064,19.301 r90 top
R405 "470R" 0402 80.1,25.5 r90 top
R406 "470R" 0402 81.708,25.5 r90 top
R500 "0R" 0603 7.675,15.1 r0 top
R501 "10R" 0603 7.175,7.8 r180 top
R502 "8k2" 0603 7.675,16.9 r180 top
R503 "4k7" 0603 7.675,13.3 r180 top
R504 "56k" 0603 20.775,3.7 r180 top
R505 "100k" 0603 17.675,3.7 r180 top
R506 "47k" 0603 15.375,23.4 r90 top
R507 "47k" 0603 9.975,23.4 r90 top
R508 "22k" 0603 7.875,19.7 r90 top
R509 "47k" 0603 15.375,7.7 r270 top
R510 "15k" 0603 9.975,7.7 r270 top
R511 "11k5" 0603 7.875,10.5 r270 top
R600 "0R" 0603 22.4,131.5 r270 top
R601 "0R" 0603 24.2,131.5 r270 top
R602 "0R" 0603 26,131.5 r270 top
R603 "0R" 0603 27.8,131.5 r270 top
R604 "1k" 0603 23.9,136.1 r270 top
R605 "220R" 0603 34.5,154.3 r180 top
R606 "220R" 0603 34.5,156.6 r180 top
R607 "4k7" 0603 21.5,155.5 r0 top
R608 "10k" 0603 30.9,151.6 r0 bottom
R609 "10k" 0603 30.9,149.8 r0 bottom
R610 "10k" 0603 32,155.1 r90 top
R611 "10k" 0603 24.7,155.5 r180 top
R612 "12k" 0603 23.3,144.9 r270 bottom
R613 "2k2" 0603 32,151.9 r270 top
R700 "0R" "0603 SMALL OUTLINE" 87.3,60.2 r90 top
R701 "1k" "0603 SMALL OUTLINE" 63.862,47.449 r90 top
R702 "330R" "0603 SMALL OUTLINE" 66.02,47.449 r90 top
R703 "1k1" 0402 61.1,45.4 r180 top
R704 "10k" 0402 54.795,65.478 r90 top
R705 "10k" 0402 61.227,65.478 r90 top
R706 "(0R)" 0402 54.279,61.77 r90 top
R707 "(0R)" 0402 90.695,62.592 r90 top
R708 "(0R)" 0402 92.1,53.1 r90 top
R709 "(50R)" 0402 59.619,65.478 r90 top
R710 "0R" 0402 87.479,62.592 r90 top
R711 "0R" 0402 95.519,62.592 r90 top
R712 "0R" 0402 93.911,62.592 r90 top
R713 "0R" 0402 92.303,62.592 r90 top
R714 "(0R)" 0402 56.403,65.478 r90 top
R715 "0R" 0402 58.011,65.478 r90 top
ST1 "USB TYP MICRO-B" ZX62D-B-5PA8 14.2,158.2 r180 top
ST2 "GPIO" 16POL_PF 57,10.9 r180 top
TP500 "TEST PAD" TEST_PAD_50 4.975,14.2 r180 top
TP700 "TESTPOINT" TEST_PAD_50 64.765,53.762 r90 top
X1 "MCX" MCX_TH 98.6,146.7 r90 top
X2 "MCX" MCX_TH 91.1,146.7 r180 top
X3 "MCX" MCX_TH 132.325,99.125 r0 top
X4 "MCX" MCX_TH 72.05,146.65 r270 top
X5 "MCX" MCX_TH 124.5,99.7 r0 top
X6 "MCX" MCX_TH 116.479,99.497 r0 top
X7 "MCX" MCX_TH 79.55,146.75 r270 top
X8 "MCX" MCX_TH 109.225,99.35 r0 top
X9 "MCX" MCX_TH 128.2,16.3 r0 top
X10 "MCX" MCX_TH 128.2,25.1 r0 top
X11 "MCX" MCX_TH 128.1,43.5 r0 top
X12 "MCX" MCX_TH 128.2,35.1 r0 top
XO700 "TBD" SMD_OSCILLATOR_ASE3_3.2x2.5 58.492,69.42 r90 top

## Footprints (in the part's own frame and the unit in brackets; to place one, negate y for a bottom-side part, rotate by r counter-clockwise, add the part's x,y. Pads: shape width x height; smd on the part's side, far side on the other; paste and mask are expansions set on the pad)
16POL_PF [mil]
  rect 62x62 hole 35: 1(-350,-50)
  round 62 hole 35: 2(-350,50) 3(-250,-50) 4(-250,50) 5(-150,-50) 6(-150,50) 7(-50,-50) 8(-50,50) 9(50,-50) 10(50,50) 11(150,-50) 12(150,50) 13(250,-50) 14(250,50) 15(350,-50) 16(350,50)
  silkscreen extent -550,-180 550,180, body extent -550,-220 550,190, height 743
48VQFN [mm] "48 Pin Plastic Quad Flat Pack No-Lead (TI RGZ/S-PVQFN-N48)"
  rect 5.15x5.15 smd: 0(0,0)
  oval 1.3x0.25 smd: 1(-3.7,2.75) 2(-3.7,2.25) 3(-3.7,1.75) 4(-3.7,1.25) 5(-3.7,0.75) 6(-3.7,0.25) 7(-3.7,-0.25) 8(-3.7,-0.75) 9(-3.7,-1.25) 10(-3.7,-1.75) 11(-3.7,-2.25) 12(-3.7,-2.75) 25(3.7,-2.75) 26(3.7,-2.25) 27(3.7,-1.75) 28(3.7,-1.25) 29(3.7,-0.75) 30(3.7,-0.25) 31(3.7,0.25) 32(3.7,0.75) 33(3.7,1.25) 34(3.7,1.75) 35(3.7,2.25) 36(3.7,2.75)
  oval 0.25x1.3 smd: 13(-2.75,-3.7) 14(-2.25,-3.7) 15(-1.75,-3.7) 16(-1.25,-3.7) 17(-0.75,-3.7) 18(-0.25,-3.7) 19(0.25,-3.7) 20(0.75,-3.7) 21(1.25,-3.7) 22(1.75,-3.7) 23(2.25,-3.7) 24(2.75,-3.7) 37(2.75,3.7) 38(2.25,3.7) 39(1.75,3.7) 40(1.25,3.7) 41(0.75,3.7) 42(0.25,3.7) 43(-0.25,3.7) 44(-0.75,3.7) 45(-1.25,3.7) 46(-1.75,3.7) 47(-2.25,3.7) 48(-2.75,3.7)
  silkscreen extent -5.03,-3.6 3.6,3.6, body extent -3.57,-3.57 3.57,3.57, height 1
64QFN [mm]
  rect 4.5x4.5 smd: 0(0,0)
  oval 2x0.3 smd: 1(-5.1,3.75) 2(-5.1,3.25) 3(-5.1,2.75) 4(-5.1,2.25) 5(-5.1,1.75) 6(-5.1,1.25) 7(-5.1,0.75) 8(-5.1,0.25) 9(-5.1,-0.25) 10(-5.1,-0.75) 11(-5.1,-1.25) 12(-5.1,-1.75) 13(-5.1,-2.25) 14(-5.1,-2.75) 15(-5.1,-3.25) 16(-5.1,-3.75) 33(5.1,-3.75) 34(5.1,-3.25) 35(5.1,-2.75) 36(5.1,-2.25) 37(5.1,-1.75) 38(5.1,-1.25) 39(5.1,-0.75) 40(5.1,-0.25) 41(5.1,0.25) 42(5.1,0.75) 43(5.1,1.25) 44(5.1,1.75) 45(5.1,2.25) 46(5.1,2.75) 47(5.1,3.25) 48(5.1,3.75)
  oval 0.3x2 smd: 17(-3.75,-5.1) 18(-3.25,-5.1) 19(-2.75,-5.1) 20(-2.25,-5.1) 21(-1.75,-5.1) 22(-1.25,-5.1) 23(-0.75,-5.1) 24(-0.25,-5.1) 25(0.25,-5.1) 26(0.75,-5.1) 27(1.25,-5.1) 28(1.75,-5.1) 29(2.25,-5.1) 30(2.75,-5.1) 31(3.25,-5.1) 32(3.75,-5.1) 49(3.75,5.1) 50(3.25,5.1) 51(2.75,5.1) 52(2.25,5.1) 53(1.75,5.1) 54(1.25,5.1) 55(0.75,5.1) 56(0.25,5.1) 57(-0.25,5.1) 58(-0.75,5.1) 59(-1.25,5.1) 60(-1.75,5.1) 61(-2.25,5.1) 62(-2.75,5.1) 63(-3.25,5.1) 64(-3.75,5.1)
  silkscreen extent -6.77,3.63 -6.52,3.87, body extent -4.53,-4.53 4.53,4.53, height 1
0402 [mm]
  rect 0.5x0.6 smd: 1(-0.5,0) 2(0.5,0)
  silkscreen extent -1.05,-0.5 1.05,0.5, body extent -0.5,-0.3 0.5,0.3, height 0.6
0603 [mil] "0603"
  rect 30x30 smd: 1(-27.5,0) 2(27.5,0)
  silkscreen extent -63,-35 63,35, body extent -30,-15 30,15, height 15
"0603 SMALL OUTLINE" [mil] "0603"
  rect 30x30 smd: 1(-27.56,0) 2(27.56,0)
  silkscreen extent -47,-29 47,29, body extent -30,-15 30,15, height 15
0603_MUX4 [mil]
  rect 30x30 smd: 1(0,0) 2(-55.12,0) 3(0,-55.12) 4(0,55.12) 5(55.12,0)
  silkscreen extent -75,-75 75,75, body extent -60,-60 60,60, height 15
0805 [mil]
  rect 60x50 smd: 1(-45,0) 2(45,0)
  silkscreen extent -95,-45 95,45, body extent -40,-25 40,25, height 20
"0805 SMALL OUTLINE" [mil]
  rect 60x50 smd: 1(-45,0) 2(45,0)
  silkscreen extent -75,-25 75,25, body extent -40,-25 40,25, height 20
1206 [mil]
  rect 60x60 smd: 1(-67.5,0) 2(67.5,0)
  silkscreen extent -118,-50 117,50, body extent -60,-30 60,30, height 25
DR74 [mm]
  rect 3x3.25 smd: 1(0,0) 2(6.223,0)
  silkscreen extent -0.69,-3.8 6.91,3.8, body extent -0.69,-3.8 6.91,3.8, height 4.35
FV1206 [mil] "Mini Circuits FV1206 Filter Case"
  rect 41x71 smd: 1(-64,0) 3(64,0)
  rect 24x49 smd: 2(0,-36) 4(0,36)
  silkscreen extent -63,-32 63,32, body extent -63,-31 63,31, height 39
"LED SMD 0603" [mil]
  rect 30x30 smd: A(-27.5,0) K(27.5,0)
  silkscreen extent -62,-35 62,35
LFCSP32_VQ [mm] "32-Lead Lead Frame Chip Scale Package 5 mm × 5 mm Body, Very Thin Quad (CP-32-2)"
  rect 3.3x3.3 smd: 0(0,0)
  oval 0.7x0.25 smd: 1(-2.5,1.75) 2(-2.5,1.25) 3(-2.5,0.75) 4(-2.5,0.25) 5(-2.5,-0.25) 6(-2.5,-0.75) 7(-2.5,-1.25) 8(-2.5,-1.75) 17(2.5,-1.75) 18(2.5,-1.25) 19(2.5,-0.75) 20(2.5,-0.25) 21(2.5,0.25) 22(2.5,0.75) 23(2.5,1.25) 24(2.5,1.75)
  oval 0.25x0.7 smd: 9(-1.75,-2.5) 10(-1.25,-2.5) 11(-0.75,-2.5) 12(-0.25,-2.5) 13(0.25,-2.5) 14(0.75,-2.5) 15(1.25,-2.5) 16(1.75,-2.5) 25(1.75,2.5) 26(1.25,2.5) 27(0.75,2.5) 28(0.25,2.5) 29(-0.25,2.5) 30(-0.75,2.5) 31(-1.25,2.5) 32(-1.75,2.5)
  silkscreen extent -3.52,-2.55 2.55,2.55, body extent -2.55,-2.55 2.55,2.55, height 1
MCX_TH [mm] "MCX Connector Through Hole Straight"
  round 1.8 hole 1.2 unplated: 1(-2.45,-2.45) 1(-2.45,2.45) 1(2.45,-2.45) 1(2.45,2.45)
  round 1.7 hole 1.1 unplated: 2(0,0)
  silkscreen extent -2.85,-2.85 2.85,2.85, body extent -2.95,-2.95 2.95,2.95, height 6
MSOP8 [mm] "8-Lead Mini Small Outline Package"
  oval 1.3x0.34 smd: 1(-2.23,0.975) 2(-2.23,0.325) 3(-2.23,-0.325) 4(-2.23,-0.975) 5(2.23,-0.975) 6(2.23,-0.325) 7(2.23,0.325) 8(2.23,0.975)
  silkscreen extent -2.35,-1.6 1.6,1.82, body extent -1.6,-1.6 1.6,1.6, height 1.1
QFN16_LONG [mm] "QFN, 16-Leads, Long Pads"
  rect 1.6x1.6 smd: 0(0,0)
  oval 1.3x0.3 smd: 1(-1.75,0.75) 2(-1.75,0.25) 3(-1.75,-0.25) 4(-1.75,-0.75) 9(1.75,-0.75) 10(1.75,-0.25) 11(1.75,0.25) 12(1.75,0.75)
  oval 0.3x1.3 smd: 5(-0.75,-1.75) 6(-0.25,-1.75) 7(0.25,-1.75) 8(0.75,-1.75) 13(0.75,1.75) 14(0.25,1.75) 15(-0.25,1.75) 16(-0.75,1.75)
  silkscreen extent -3.07,-1.6 1.6,1.6, body extent -1.57,-1.58 1.58,1.57, height 1
SMD_OSCILLATOR_ASE3_3.2x2.5 [mil] "Abracon SMD Oscillator 3.2mm x 2.5mm (ASE3)"
  rrect20% 47x39 smd: 1(-50,-32.5) 2(50,-32.5) 3(50,32.5) 4(-50,32.5)
  silkscreen extent -67,-75 67,53, body extent -67,-53 67,53, height 47
SMD_XTAL_5x3.2 [mm]
  rrect20% 2.5x2.4 smd: 1(-2.25,0) 2(2.25,0)
  silkscreen extent -2.5,-1.6 2.5,1.6, body extent -2.5,-1.6 2.5,1.6, height 1.35
TEST_PAD_50 [mm] "SMD Pad 50mil Round"
  round 1.27 smd: 0(0,0)
TQFP100 [mm] "TSQFP, 100-Leads, Body 16,5x16,5mm (max), Pitch 0,50mm, IPC Low Density"
  oval 2.45x0.35 smd: 1(-7.625,6) 2(-7.625,5.5) 3(-7.625,5) 4(-7.625,4.5) 5(-7.625,4) 6(-7.625,3.5) 7(-7.625,3) 8(-7.625,2.5) 9(-7.625,2) 10(-7.625,1.5) 11(-7.625,1) 12(-7.625,0.5) 13(-7.625,0) 14(-7.625,-0.5) 15(-7.625,-1) 16(-7.625,-1.5) 17(-7.625,-2) 18(-7.625,-2.5) 19(-7.625,-3) 20(-7.625,-3.5) 21(-7.625,-4) 22(-7.625,-4.5) 23(-7.625,-5) 24(-7.625,-5.5) 25(-7.625,-6) 51(7.625,-6) 52(7.625,-5.5) 53(7.625,-5) 54(7.625,-4.5) 55(7.625,-4) 56(7.625,-3.5) 57(7.625,-3) 58(7.625,-2.5) 59(7.625,-2) 60(7.625,-1.5) 61(7.625,-1) 62(7.625,-0.5) 63(7.625,0) 64(7.625,0.5) 65(7.625,1) 66(7.625,1.5) 67(7.625,2) 68(7.625,2.5) 69(7.625,3) 70(7.625,3.5) 71(7.625,4) 72(7.625,4.5) 73(7.625,5) 74(7.625,5.5) 75(7.625,6)
  oval 0.35x2.45 smd: 26(-6,-7.625) 27(-5.5,-7.625) 28(-5,-7.625) 29(-4.5,-7.625) 30(-4,-7.625) 31(-3.5,-7.625) 32(-3,-7.625) 33(-2.5,-7.625) 34(-2,-7.625) 35(-1.5,-7.625) 36(-1,-7.625) 37(-0.5,-7.625) 38(0,-7.625) 39(0.5,-7.625) 40(1,-7.625) 41(1.5,-7.625) 42(2,-7.625) 43(2.5,-7.625) 44(3,-7.625) 45(3.5,-7.625) 46(4,-7.625) 47(4.5,-7.625) 48(5,-7.625) 49(5.5,-7.625) 50(6,-7.625) 76(6,7.625) 77(5.5,7.625) 78(5,7.625) 79(4.5,7.625) 80(4,7.625) 81(3.5,7.625) 82(3,7.625) 83(2.5,7.625) 84(2,7.625) 85(1.5,7.625) 86(1,7.625) 87(0.5,7.625) 88(0,7.625) 89(-0.5,7.625) 90(-1,7.625) 91(-1.5,7.625) 92(-2,7.625) 93(-2.5,7.625) 94(-3,7.625) 95(-3.5,7.625) 96(-4,7.625) 97(-4.5,7.625) 98(-5,7.625) 99(-5.5,7.625) 100(-6,7.625)
  silkscreen extent -7.75,-6 6,6.85, body extent -7,-7 7,7, height 1.6
VHDCI-68_M [mm]
  round 1.8 hole 1.2: 0(-32.35,0) 0(0,0)
  round 1 hole 0.65: 1(-29.575,1.2) 2(-28.775,2.35) 3(-27.975,1.2) 4(-27.175,2.35) 5(-26.375,1.2) 6(-25.575,2.35) 7(-24.775,1.2) 8(-23.975,2.35) 9(-23.175,1.2) 10(-22.375,2.35) 11(-21.575,1.2) 12(-20.775,2.35) 13(-19.975,1.2) 14(-19.175,2.35) 15(-18.375,1.2) 16(-17.575,2.35) 17(-16.775,1.2) 18(-15.975,2.35) 19(-15.175,1.2) 20(-14.375,2.35) 21(-13.575,1.2) 22(-12.775,2.35) 23(-11.975,1.2) 24(-11.175,2.35) 25(-10.375,1.2) 26(-9.575,2.35) 27(-8.775,1.2) 28(-7.975,2.35) 29(-7.175,1.2) 30(-6.375,2.35) 31(-5.575,1.2) 32(-4.775,2.35) 33(-3.975,1.2) 34(-3.175,2.35) 35(-29.175,-1.15) 36(-28.375,0) 37(-27.575,-1.15) 38(-26.775,0) 39(-25.975,-1.15) 40(-25.175,0) 41(-24.375,-1.15) 42(-23.575,0) 43(-22.775,-1.15) 44(-21.975,0) 45(-21.175,-1.15) 46(-20.375,0) 47(-19.575,-1.15) 48(-18.775,0) 49(-17.975,-1.15) 50(-17.175,0) 51(-16.375,-1.15) 52(-15.575,0) 53(-14.775,-1.15) 54(-13.975,0) 55(-13.175,-1.15) 56(-12.375,0) 57(-11.575,-1.15) 58(-10.775,0) 59(-9.975,-1.15) 60(-9.175,0) 61(-8.375,-1.15) 62(-7.575,0) 63(-6.775,-1.15) 64(-5.975,0) 65(-5.175,-1.15) 66(-4.375,0) 67(-3.575,-1.15) 68(-2.775,0)
  round 0 hole 1.8 unplated: ""(-37.125,-2.625) ""(4.775,-2.625)
  silkscreen extent -37.38,-14.05 5.45,2.35, body extent -37.38,-6.65 5.45,2.35, height 5
VQFN20 [mm]
  rect 3.3x3.3 smd: 0(0,0)
  oval 0.95x0.35 smd: 1(-2.425,1.3) 2(-2.425,0.65) 3(-2.425,0) 4(-2.425,-0.65) 5(-2.425,-1.3) 11(2.425,-1.3) 12(2.425,-0.65) 13(2.425,0) 14(2.425,0.65) 15(2.425,1.3)
  oval 0.35x0.95 smd: 6(-1.3,-2.425) 7(-0.65,-2.425) 8(0,-2.425) 9(0.65,-2.425) 10(1.3,-2.425) 16(1.3,2.425) 17(0.65,2.425) 18(0,2.425) 19(-0.65,2.425) 20(-1.3,2.425)
  silkscreen extent -3.57,-2.6 2.6,2.6, body extent -2.57,-2.58 2.58,2.57, height 1
XTAL_SMD_60_35 [mm]
  rect 1.9x2.4 smd: 1(2.25,0) 2(-2.25,0)
  silkscreen extent -3,-1.8 3,1.7
ZX62D-B-5PA8 [mm] "Micro USB-B receptacle"
  oval 1.225x1.9 hole 0.825 slot 1.5 at 90 deg: 0(-3.6,0) 0(3.6,0)
  oval 1.05x1.25 hole 0.65 slot 0.85 at 90 deg: 0(-2.425,2.9) 0(2.425,2.9)
  rect 0.4x1 smd: 1(-1.3,2.725) 2(-0.65,2.725) 3(0,2.725) 4(0.65,2.725) 5(1.3,2.725)
  Top Layer region: -2.6,0.95 -4.2,0.95 -4.391,0.912 -4.554,0.804 -4.662,0.641 -4.7,0.45 -4.7,0.45 -4.7,-0.45 -4.662,-0.641 -4.554,-0.804 -4.391,-0.912 -4.2,-0.95 -4.2,-0.95 -2.6,-0.95 -2.6,-0.95
  Top Layer region: 2.6,-0.95 4.2,-0.95 4.391,-0.912 4.554,-0.804 4.662,-0.641 4.7,-0.45 4.7,-0.45 4.7,0.45 4.662,0.641 4.554,0.804 4.391,0.912 4.2,0.95 4.2,0.95 2.6,0.95 2.6,0.95
  Bottom Layer region: 2.6,-0.95 4.2,-0.95 4.391,-0.912 4.554,-0.804 4.662,-0.641 4.7,-0.45 4.7,-0.45 4.7,0.45 4.662,0.641 4.554,0.804 4.391,0.912 4.2,0.95 4.2,0.95 2.6,0.95 2.6,0.95
  Bottom Layer region: -2.6,0.95 -4.2,0.95 -4.391,0.912 -4.554,0.804 -4.662,0.641 -4.7,0.45 -4.7,0.45 -4.7,-0.45 -4.662,-0.641 -4.554,-0.804 -4.391,-0.912 -4.2,-0.95 -4.2,-0.95 -2.6,-0.95 -2.6,-0.95
  Keep-Out Layer region: 2.05,0.975 2.6,0.975 2.6,-0.975 2.05,-0.975
  Keep-Out Layer region: -2.6,0.975 -2.05,0.975 -2.05,-1 -2.6,-1
  Keep-Out Layer region: -0.25,0.975 0.25,0.975 0.25,-1 -0.25,-1
  Keep-Out Layer region: 3.75,-1.45 3.75,-0.95 -3.75,-0.95 -3.75,-1.45
  Keep-Out Layer region: -3.75,0.95 -3.75,2 3.75,2 3.75,0.95
  silkscreen extent -3.75,-1.45 3.75,2, body extent -4.05,-2.7 4.05,3.1, height 2.75